# Allegro board RZ01-HMIB-V1.2-0609.brd
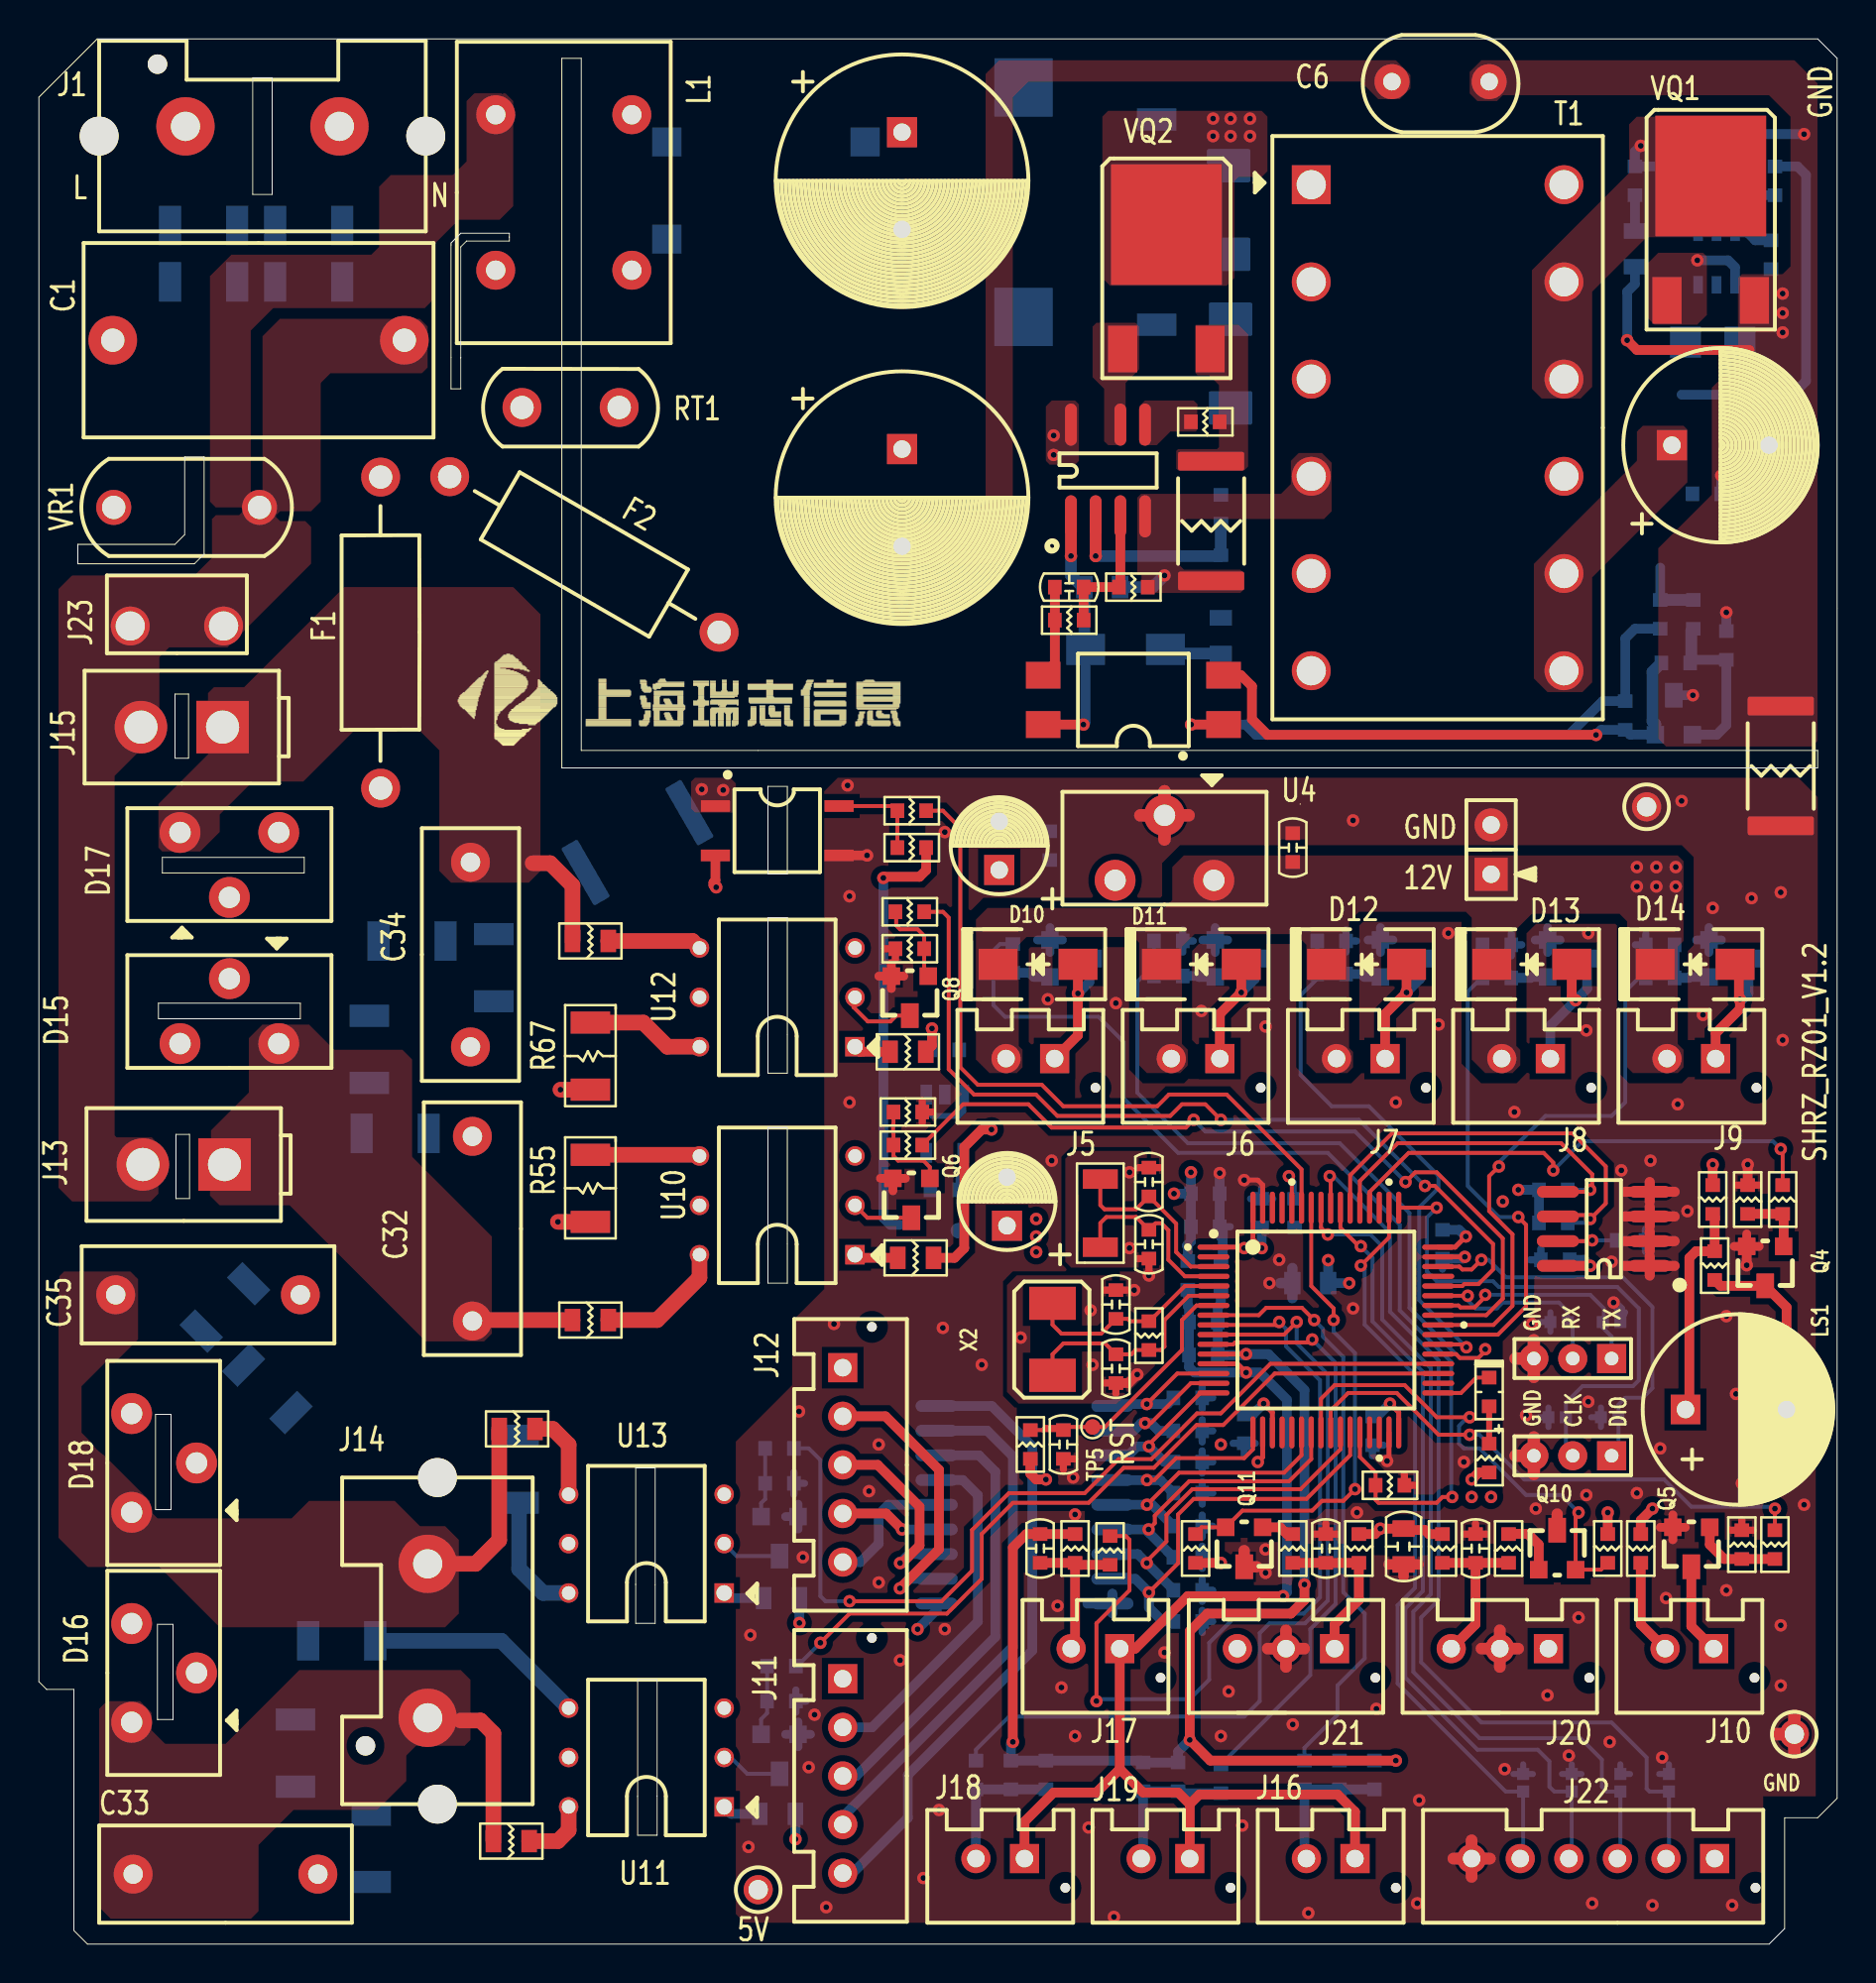
[diagram p0: board, top side]
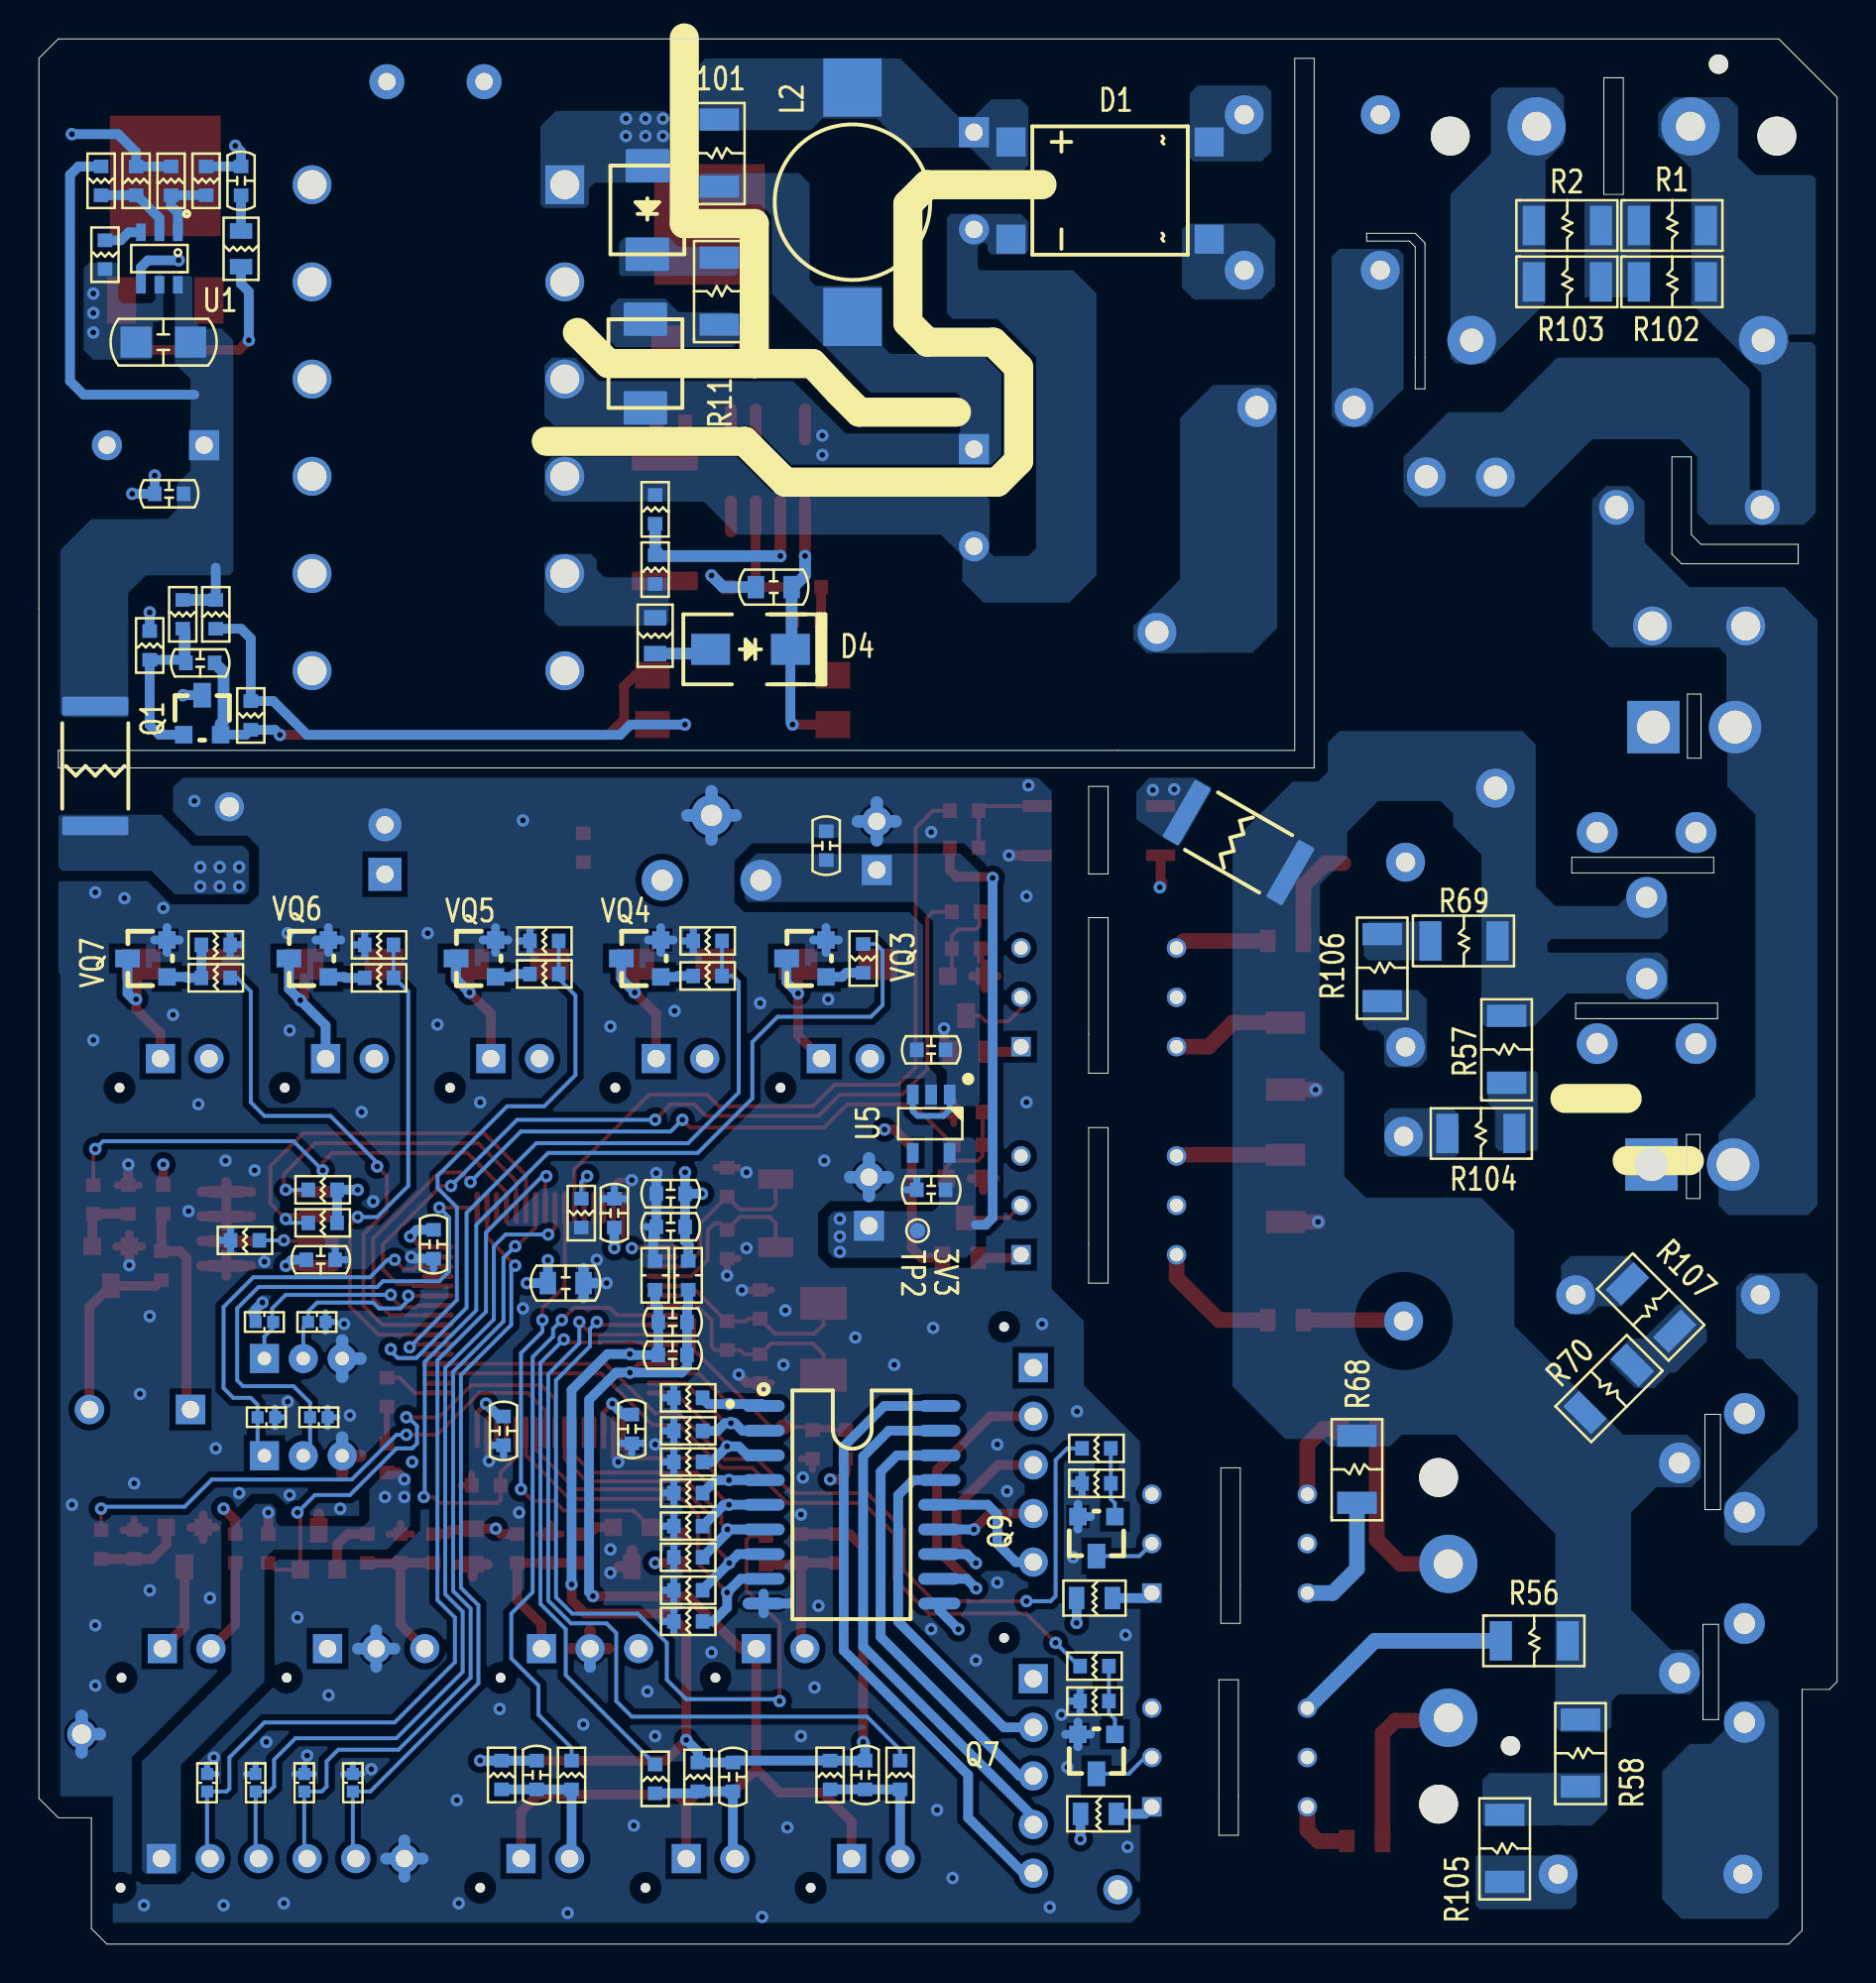
[diagram p1: board, bottom side, seen from below]

Outline 92.5 x 98 mm; copper layers: TOP, GND, PWR, BOTTOM. Coordinates in mm from the lower left corner of the outline.
Outline path: 0,95 0,13.5 0.4,13.1 1.8,13.1 1.8,0.7 2.5,0 89,0 89.8,0.8 89.8,6.5 91.5,6.5 92.5,7.5 92.5,97 91.5,98 3,98 0,95 ; 2,72 7,72 7.5,72.5 7.5,76.5 8.5,76.5 8.5,71.5 8,71 2,71 2,72 ; 6,27.25 6,22.35 6.8,22.35 6.8,27.25 6,27.25 ; 6.1,16.45 6.1,11.55 6.9,11.55 6.9,16.45 6.1,16.45 ; 6.15,48.4 6.15,47.6 13.45,47.6 13.45,48.4 6.15,48.4 ; 6.35,55.9 6.35,55.1 13.65,55.1 13.65,55.9 6.35,55.9 ; 7,64.3 7,61 7.7,61 7.7,64.3 7,64.3 ; 7.05,41.65 7.05,38.35 7.75,38.35 7.75,41.65 7.05,41.65 ; 11,96 11,90 12,90 12,96 11,96 ; 21.2,87.5 21.7,88 24.2,88 24.2,87.6 22,87.6 21.7,87.3 21.7,80 21.2,80 21.2,87.5 ; 26.9,97 26.9,60.5 91.5,60.5 91.5,61.4 27.9,61.4 27.9,97 26.9,97 ; 30.7,24.5 30.7,16.5 31.7,16.5 31.7,24.5 30.7,24.5 ; 30.8,13.6 30.8,5.6 31.8,5.6 31.8,13.6 30.8,13.6 ; 37.5,59.55 37.5,55.05 38.5,55.05 38.5,59.55 37.5,59.55 ; 37.5,52.8 37.5,44.8 38.5,44.8 38.5,52.8 37.5,52.8 ; 37.5,42 37.5,34 38.5,34 38.5,42 37.5,42

## Design rules (mm)
net group POW: nets N16936948 N16936962 N16936988 N16937095 N16937097 N16937111 N16937117 N16937127 N16937157 N16937225 N16937517 N16937797
net group PWR: nets GNDA GNDAC VCCA_3V3 VIN

## Placement (name value [footprint] x y rotation side)
C1  X2/1uF/275V  [X2-1770X960]  11.3 82.5 0 top
C2  RNU1C471MDN1PH/470uF/25V  [CAPPR500-1000X1250]  86.5 77.1 0 top
C3  22uF/400V/13*20  [CAPPR500-1300X2000]  44.4 90.7 270 top
C4  22uF/400V/13*20  [CAPPR500-1300X2000]  44.4 74.4 270 top
C5  1uF/100V/1206  [C1206]  86.1 82.4 0 bottom
C6  DE2E3KY222MA2BM01/2200pF/250V  [DIP-500P-800X500]  72.1 95.8 0 top
C7  0.1uF/50V/6  [C0603]  53 69.8 180 top
C8  1nF/50V/6  [C0603]  84.2 65.9 0 bottom
C9  4.7uF/35V/8  [C0805]  54.7 69.8 0 bottom
C10  1uF/25V/6  [C0603]  64.5 56.4 90 top
C11  0.1uF/50V/6  [C0603]  52 56.5 270 bottom
C12  100uF/25V/5*12  [CAPPR250-500X1200]  49.4 56.5 90 top
C13  1uF/25V/6  [C0603]  46.6 46 0 bottom
C14  0.1uF/50V/6  [C0603]  46.6 38.8 180 bottom
C15  100uF/25V/5*12  [CAPPR250-500X1200]  49.8 38.2 90 top
C16  10pF/50V/6  [C0603]  57.1 39.2 270 top
C17  10pF/50V/6  [C0603]  57.1 36 90 top
C18  10uF/16V/8  [C0805]  65.4 34 0 bottom
C19  0.1uF/50V/6  [C0603]  60 36.9 180 bottom
C20  0.1uF/50V/6  [C0603]  72.2 36 90 bottom
C21  0.1uF/50V/6  [C0603]  68.6 26.4 90 bottom
C22  0.1uF/50V/6  [C0603]  62 26.5 90 bottom
C23  0.1uF/50V/6  [C0603]  62.9 37.6 270 bottom
C24  20pF/50V/6  [C0603]  55.4 32.9 270 top
C25  20pF/50V/6  [C0603]  55.4 29.6 90 top
C26  1uF/25V/6  [C0603]  59.9 32 0 bottom
C27  0.1uF/50V/6  [C0603]  59.9 30.3 180 bottom
C29  1uF/25V/6  [C0603]  52.7 25.7 270 top
C30  0.1uF/50V/6  [C0603]  78 35.2 0 bottom
C32  X2/0.01uF/275V  [X2-1300X600]  22.3 36.8 270 top
C33  X2/0.01uF/275V  [X2-1300X600]  9.6 3.6 180 top
C34  X2/0.01uF/275V  [X2-1300X600]  22.2 50.9 90 top
C35  X2/0.01uF/275V  [X2-1300X600]  8.7 33.4 180 top
C36  0.01uF/50V/6  [C0603]  66.9 8.7 90 bottom
C37  0.01uF/50V/6  [C0603]  51.5 20.35 90 top
C38  0.01uF/50V/6  [C0603]  50 8.7 90 bottom
C39  0.01uF/50V/6  [C0603]  56.8 8.6 90 bottom
C40  0.01uF/50V/6  [C0603]  73.9 20.35 90 top
C41  1nF/50V/6  [C0603]  66.2 20.35 90 top
C42  10uF/16V/8  [C0805]  70.2 20.45 90 top
C43  0.1uF/50V/6  [C0603]  60 38.6 180 bottom
C44  1nF/100V/6  [C0603]  82.1 90.7 90 bottom
C45  0.1uF/50V/6  [C0603]  85.8 74.6 180 bottom
D1  -  [DF06S]  37.4 90.2 90 bottom
D2  SMBJ170A-13-F  [SMB]  61.3 81.3 270 bottom
D3  MURS360S  [SMB]  61.2 89.2 90 bottom
D4  US1K-E3/61T  [SMA]  57.75 66.6 180 bottom
D5  RLED  [LED0603]  74.6 28.4 90 top
D10  SS14  [SMA]  53.25 50.4 180 top
D11  SS14  [SMA]  61.65 50.4 180 top
D12  SS14  [SMA]  70.15 50.4 180 top
D13  SS14  [SMA]  78.65 50.4 180 top
D14  SS14  [SMA]  87.05 50.4 180 top
D15  TMG8C80F  [TO-220]  9.8 47.82 180 top
D16  TMG8C80F  [TO-220]  6.27 13.95 90 top
D17  TMG8C80F  [TO-220]  9.8 55.68 0 top
D18  TMG8C80F  [TO-220]  6.27 24.75 90 top
ED1  ESD9B5V  [D0402]  80.7 27.1 180 bottom
ED2  ESD9B5V  [D0402]  78 27.1 180 bottom
ED3  ESD9B5V  [D0402]  81 32 0 bottom
ED4  ESD9B5V  [D0402]  78.1 32 180 bottom
ED5  ESD9B5V  [D0402]  76.35 8.4 90 bottom
ED6  ESD9B5V  [D0402]  78.85 8.4 90 bottom
ED7  ESD9B5V  [D0402]  81.35 8.4 90 bottom
ED8  ESD9B5V  [D0402]  83.85 8.4 90 bottom
F1  250AC/10A/3.6*10  [DIP-F360X1000]  17.58 67.46 270 top
F2  250AC/2A/3.6*10  [DIP-F360X1000]  28.06 71.48 330 top
J1  CON2  [DIP780-1580X850-2N]  11.5 93.5 180 top
J2  CON2  [DIP254P-1X2]  74.7 55.03 90 top
J3  CON3  [DIP200P-1X3]  80.9 25.12 180 top
J4  CON3  [DIP200P-1X3]  80.9 30.12 180 top
J5  CON2  [XH2-54-1X2]  51 45.55 180 top
J6  CON2  [XH2-54-1X2]  59.5 45.55 180 top
J7  CON2  [XH2-54-1X2]  68 45.55 180 top
J8  CON2  [XH2-54-1X2]  76.5 45.55 180 top
J9  CON2  [XH2-54-1X2]  85 45.55 180 top
J10  CON2  [XH2-54-1X2]  84.9 15.2 180 top
J11  CON5  [XH2-54-1X5]  41.35 8.65 270 top
J12  CON5  [XH2-54-1X5]  41.35 24.65 270 top
J13  CON2  [5569-420-2N]  7.45 40.1 180 top
J14  CON2  [DIP780-1580X850-2N]  20 15.6 270 top
J15  CON2  [5569-420-2N]  7.35 62.6 180 top
J16  CON2  [XH2-54-1X2]  66.45 4.4 180 top
J17  CON2  [XH2-54-1X2]  54.35 15.2 180 top
J18  CON2  [XH2-54-1X2]  49.45 4.4 180 top
J19  CON2  [XH2-54-1X2]  57.95 4.4 180 top
J20  CON3  [XH2-54-1X3]  75.15 15.2 180 top
J21  CON3  [XH2-54-1X3]  64.15 15.2 180 top
J22  CON6  [XH2-54-1X6]  81.2 4.4 180 top
J23  CON2  [DIP480P-2N]  7.1 67.8 180 top
L1  5mH/1.5A/7*8  [L_7X8-4]  27 90.1 90 top
L2  NPI31W471MTRF/470uH/0.5A  [NPI31W471MTRF]  50.65 89.6 270 bottom
LFB1  CBW160808U601T/1A/6  [L0603]  59.1 34.4 270 bottom
LFB2  CBW160808U601T/1A/6  [L0603]  60.8 34.4 270 bottom
LS1  SPEAKER  [B9055]  87.2 27.5 0 top
Q1  TL432IDBZ  [SOT23]  84.1 63.2 180 bottom
Q4  MMBT3904LT1G  [SOT23]  88.8 34.9 180 top
Q5  MMBT3904LT1G  [SOT23]  85 20.45 180 top
Q6  MMBT3904LT1G  [SOT23]  44.88 38.4 180 top
Q7  MMBT3904LT1G  [SOT23]  38.1 9.8 0 bottom
Q8  MMBT3904LT1G  [SOT23]  44.8 48.8 180 top
Q9  MMBT3904LT1G  [SOT23]  38.1 21 0 bottom
Q10  MMBT3906LT1G  [SOT23]  78.1 20.25 0 top
Q11  MMBT3906LT1G  [SOT23]  62 20.45 180 top
R1  1M/1206  [R1206]  10.2 88.4 180 bottom
R2  1M/1206  [R1206]  15.6 88.4 180 bottom
R3  R005/2512  [R2512]  89.6 60.6 90 bottom
R4  365K/6  [R0603]  83.9 90.7 90 bottom
R5  10R/8  [R0805]  82.1 87.2 90 bottom
R6  301K/1%6  [R0603]  89.3 90.7 90 bottom
R7  10K/6  [R0603]  85.7 90.7 270 bottom
R8  71.5K/1%/6  [R0603]  60.8 70.7 270 bottom
R9  22R/8  [R0805]  60.8 67.3 90 bottom
R10  19.1K/1%/6  [R0603]  89.1 86.9 90 bottom
R11  44.2K/1%/6  [R0603]  87.5 90.7 270 bottom
R12  7.32K/1%/6  [R0603]  83.4 68.4 270 bottom
R13  1.24K/1%/6  [R0603]  60 78.3 0 top
R14  1K/6  [R0603]  81.6 63.2 90 bottom
R15  38.3K/1%/6  [R0603]  85.1 68.4 90 bottom
R16  205K/1%/6  [R0603]  53 68.1 0 top
R17  R500/2512  [R2512]  60.3 73.2 90 top
R18  18.7K/1%/6  [R0603]  56.3 69.8 180 top
R19  19.6K/1%/6  [R0603]  60.8 73.8 270 bottom
R20  10K/1%/6  [R0603]  86.8 66.8 270 bottom
R21  1M/6/NC  [R0603]  57.1 31.3 90 top
R24  10K/6  [R0603]  64.6 37.6 90 bottom
R25  10K/6  [R0603]  69.5 23.6 180 top
R26  10K/6  [R0603]  51 25.7 270 top
R27  1K/6  [R0603]  74.6 25 270 top
R30  4.7K/6  [R0603]  77.9 37.1 180 bottom
R31  4.7K/6  [R0603]  77.9 38.8 180 bottom
R32  1K/6  [R0603]  81.9 36.2 180 bottom
R33  1K/6  [R0603]  50.1 50.7 90 bottom
R34  1K/6  [R0603]  58.1 49.8 180 bottom
R35  100K/6  [R0603]  58.1 51.6 180 bottom
R36  100R/6  [R0603]  86.1 38.3 90 top
R38  1K/6  [R0603]  66.5 49.9 180 bottom
R39  1K/6  [R0603]  75 49.7 180 bottom
R41  100K/6  [R0603]  66.5 51.6 180 bottom
R42  100K/6  [R0603]  75 51.4 180 bottom
R44  1K/6  [R0603]  86.2 34.9 90 top
R46  1K/6  [R0603]  89.7 38.3 270 top
R47  220R/6  [R0603]  82.4 20.35 90 top
R48  100K/6  [R0603]  87.9 38.3 270 top
R49  1K/6  [R0603]  89.3 20.55 90 top
R50  1K/6  [R0603]  83.4 49.7 180 bottom
R51  100K/6  [R0603]  83.4 51.4 0 bottom
R52  100K/6  [R0603]  87.6 20.55 270 top
R53  200R/8  [R0805]  45.1 35.3 180 top
R54  200R/8  [R0805]  38 6.7 180 bottom
R55  510R/1206  [R1206]  28.37 40.6 270 top
R56  510R/1206  [R1206]  17.3 15.6 180 bottom
R57  100R/1206  [R1206]  17 44.3 90 bottom
R58  100R/1206  [R1206]  13.2 8.1 90 bottom
R59  10K/6  [R0603]  44.7 41.1 180 top
R60  10K/6  [R0603]  38.2 14.3 180 bottom
R61  200R/8  [R0805]  28.37 32.1 180 top
R62  100K/6  [R0603]  44.7 42.8 180 top
R63  100K/6  [R0603]  38.2 12.5 180 bottom
R64  200R/8  [R0805]  24.3 5.3 180 top
R65  200R/8  [R0805]  44.7 45.9 180 top
R66  200R/8  [R0805]  38.2 17.8 180 bottom
R67  510R/1206  [R1206]  28.37 47.4 270 top
R68  510R/1206  [R1206]  24.7 22.7 90 bottom
R69  100R/1206  [R1206]  20.92 51.6 180 bottom
R70  100R/1206  [R1206#2]  10.53 29.78 315 bottom
R71  10K/6  [R0603]  44.8 53.1 180 top
R72  10K/6  [R0603]  38.1 25.5 180 bottom
R73  100K/6  [R0603]  44.8 51.2 0 top
R74  200R/8  [R0805]  28.37 51.6 180 top
R75  100K/6  [R0603]  38.1 23.7 180 bottom
R76  200R/8  [R0805]  24.6 26.5 180 top
R77  43K/2512  [R2512]  30.79 56.66 210 bottom
R78  4.7K/6  [R0603]  44.9 56.4 180 top
R79  1K/6  [R0603]  44.9 58.3 180 top
R80  1K/6  [R0603]  65.1 8.7 270 bottom
R81  1K/6  [R0603]  55.1 20.25 270 top
R82  6.8K/1%/6  [R0603]  68.7 8.7 270 bottom
R83  51K/1%/6  [R0603]  53.3 20.35 270 top
R84  1K/6  [R0603]  48.2 8.7 270 bottom
R85  1K/6  [R0603]  60.8 8.5 270 bottom
R86  51K/1%/6  [R0603]  51.8 8.7 270 bottom
R87  6.8K/1%/6  [R0603]  58.6 8.6 270 bottom
R88  10K/6  [R0603]  80.7 20.35 90 top
R89  10K/6  [R0603]  59.5 20.35 270 top
R90  10K/6  [R0603]  72.2 20.35 90 top
R91  10K/6  [R0603]  67.9 20.35 90 top
R92  1K/6  [R0603]  75.6 20.35 270 top
R93  1K/6  [R0603]  64.5 20.35 270 top
R101  0R/1206/NC  [R1206]  57.5 90.4 90 bottom
R102  1M/1206  [R1206]  10.2 85.5 180 bottom
R103  1M/1206  [R1206]  15.6 85.5 180 bottom
R104  100R/1206  [R1206]  16.6 41.7 0 bottom
R105  100R/1206  [R1206]  17.1 3.2 90 bottom
R106  100R/1206  [R1206]  23.4 48.5 90 bottom
R107  100R/1206  [R1206#2]  10.79 33.97 225 bottom
R108  10K/6  [R0603]  59.1 28.1 180 bottom
R109  10K/6  [R0603]  59.1 26.4 180 bottom
R110  10K/6  [R0603]  59.1 24.8 180 bottom
R111  10K/6  [R0603]  59.1 23.2 180 bottom
R112  10K/6  [R0603]  59.1 21.5 180 bottom
R113  10K/6  [R0603]  59.1 19.9 180 bottom
R114  10K/6  [R0603]  59.1 18.2 180 bottom
R115  10K/6  [R0603]  59.1 16.6 180 bottom
R116  49.9R/1206  [R1206]  57.5 83.3 90 bottom
R117  R005/2512  [R2512]  89.6 60.6 90 top
RT1  -  [NTC10D-9]  27.35 79.04 0 top
T1  TRAN_ISDN_10  [T_30X17-12]  71.95 78 0 top
TP1  VCC_5V0  [TP150D100]  37 2.8 0 top
TP2  VCC_3V3  [TP_PAD]  47.3 36.7 270 bottom
TP3  GND  [TP150D100]  82.7 58.5 0 top
TP4  GND  [TP150D100]  90.3 10.8 0 top
TP5  RST#  [TP_PAD]  54.2 26.6 0 top
U1  UCC24636DBV  [SOT23_6]  86.3 86.7 0 bottom
U2  UCC28740D  [SOIC127P600X175-7]  55 75.8 0 top
U3  EL817S1B  [SOIC254P760X460-4]  56.3 64 90 top
U4  L7805CV-DG/NCV7805BTG  [TO-220]  57.9 56.22 180 top
U5  LP3987H-33B5F/RT9013-33GB  [SOT23-5]  46.6 42.2 90 bottom
U6  STM32F103R8T6  [TSQFP50P1200X1200X145-64]  66.2 32.1 0 top
U8  AT24C64D-SSHM/CAT24C64WI-GT  [SOIC127P600X175-8]  80.5 36.8 90 top
U9  ULN2803A  [SOIC127P1032X265-18]  50.7 22.6 270 bottom
U10  MOC3063  [DIP254-760X660-6]  37.98 38 180 top
U11  MOC3063  [DIP254-760X660-6]  31.25 9.6 180 top
U12  MOC3063  [DIP254-760X660-6]  37.98 48.7 180 top
U13  MOC3063  [DIP254-760X660-6]  31.25 20.6 180 top
U14  EL354N  [SOIC254P440X410-4]  37.98 57.27 270 top
VQ1  SiHD6N65E/STD12N65M2  [TO-252]  86 90.95 0 top
VQ2  SiHD6N65E/STD12N65M2  [TO-252]  58 88.45 0 top
VQ3  AO3404A  [SOT23]  53 50.7 90 bottom
VQ4  AO3404A  [SOT23]  61.5 50.7 90 bottom
VQ5  AO3404A  [SOT23]  70 50.7 90 bottom
VQ6  AO3404A  [SOT23]  78.6 50.7 90 bottom
VQ7  AO3404A  [SOT23]  86.9 50.7 90 bottom
VR1  -  [MYG3-10D431K]  7.6 73.9 180 top
X1  32.768KHz/CL=7pF  [SMD3215]  54.6 35.85 90 top
X2  8MHz/CL=20pF  [CRYTAL_17X24]  52.14 29.26 90 top

## Library data of the parts
C1 C5 C6 C32-C35 = C_0
C2 = CAPACITOR: Tolerance: RichardLC; User Part Number: pn
C3 C4 C12 C15 = CAPACITOR: User Part Number: pn; Tolerance: RichardLC
C7-C10 C13 C16 C17 C24-C26 C29 C36-C41 = C_0: User Part Number: pn; Tolerance: RichardLC
C11 C14 C18-C23 C27 C30 C42-C45 = CAP NP: User Part Number: pn; Tolerance: RichardLC
D1 = GBPC608_1
D2 = DIODE ZENER: User Part Number: pn; Tolerance: RichardLC
D3 = DIODE SCHOTTKY_0: User Part Number: pn; Tolerance: RichardLC
D4 = DIODE SCHOTTKY_0
D5 = LED: User Part Number: pn; Tolerance: RichardLC
D10-D14 = DIODE SCHOTTKY
D15-D18 = GTO A1A2G_0
ED1-ED8 = TVS: Tolerance: RichardLC; User Part Number: pn
F1 F2 = FUSE: Tolerance: RichardLC
J1 J5-J10 J13-J19 J23 = CON2
J2 = CON2: User Part Number: pn; Tolerance: RichardLC
J3 J4 = CON3: User Part Number: pn; Tolerance: RichardLC
J11 J12 = CON5
J20 J21 = CON3
J22 = CON6
L1 = R-PACK4_0: Tolerance: RichardLC
L2 = INDUCTOR
LFB1 LFB2 = EMIFIL: User Part Number: 04201000008830; Tolerance: RichardLC
LS1 = SPEAKER_0
Q1 = TL431IDBZ_0
Q4-Q9 = NPN_1
Q10 Q11 = PNP
R1 R2 R55-R58 R67-R70 R101-R107 R116 RT1 = R
R3 R4 R6-R8 R10-R21 R24 R25 R27 R33-R35 R38 R39 R41 R42 R44 R46-R52 R59 R60 R62 R63 R71-R73 R75 R77-R93 R108-R115 R117 = R: User Part Number: pn; Tolerance: RichardLC
R5 R9 R53 R54 R61 R64-R66 R74 R76 = R: Tolerance: RichardLC; User Part Number: pn
R26 R36 = RESISTOR: User Part Number: pn; Tolerance: RichardLC
R30-R32 = Res1_0: User Part Number: pn; Tolerance: RichardLC
T1 = TRAN_ISDN_9: Tolerance: RichardLC
TP1 TP3 TP4 = TEST POINT: User Part Number: pn; Tolerance: RichardLC
TP2 TP5 = T_POINT_R
U1 = UCC24636DBV
U2 = UCC28740D: User Part Number: pn; Tolerance: RichardLC
U3 = TLP181_1: User Part Number: pn; Tolerance: RichardLC
U4 = LM7805MP_2
U5 = RT9050
U6 = STM32F103R8T6: Tolerance: RichardLC; User Part Number: pn
U8 = 24C64_0: User Part Number: pn; Tolerance: RichardLC
U9 = ULN2803A: Tolerance: RichardLC; User Part Number: pn
U10 U11 = MOC3063_1
U12 U13 = MOC3063_2
U14 = AC-Optocoupler: User Part Number: pn; Tolerance: RichardLC
VQ1 VQ2 = NMOS_0
VQ3-VQ7 = IRF_N_G1S2D3
VR1 = RESISTOR VAR 2
X1 X2 = CRYSTAL_0

## Footprints (pads in the part's own frame, mm; a bottom-side part is the same pattern mirrored in y, then rotated)
5569-420-2N
  rect 2.7x2.7 hole 1.7: 1(-2.1,0)
  round 2.7 hole 1.7: 2(2.1,0)
B9055
  rect 1.52x1.52 hole 0.9: 1(-2.5,0)
  round 1.52 hole 0.9: 2(2.7,0)
C0603
  rect 0.7x0.75 smd: 1(-0.74,0) 2(0.74,0)
C0805
  rect 0.85x1.15 smd: 1(-0.92,0) 2(0.92,0)
C1206
  rect 1.6x1.6 smd: 1(-1.4,0) 2(1.4,0)
CAPPR250-500X1200
  rect 1.55x1.55 hole 0.9: 1(-1.25,0)
  round 1.55 hole 0.9: 2(1.25,0)
CAPPR500-1000X1250
  rect 1.55x1.55 hole 0.9: 1(-2.5,0)
  round 1.55 hole 0.9: 2(2.5,0)
CAPPR500-1300X2000
  rect 1.55x1.55 hole 0.9: 1(-2.5,0)
  round 1.55 hole 0.9: 2(2.5,0)
CRYTAL_17X24
  rect 1.7x2.4 smd: 1(0,0) 2(3.7,0)
D0402
  rect 0.62x0.62 smd: 1(-0.55,0) 2(0.35,0)
DF06S
  rect 1.5x1.5 smd: 1(2.5,5.1) 2(-2.5,5.1) 3(2.5,-5.1) 4(-2.5,-5.1)
DIP200P-1X3
  rect 1.5x1.5 hole 0.7: 1(0,0)
  round 1.5 hole 0.7: 2(2,0) 3(4,0)
DIP254-760X660-6
  rect 1x1 hole 0.8: 1(-4,2.54)
  round 1 hole 0.7: 2(-4,0) 3(-4,-2.54) 4(4,-2.54) 5(4,0) 6(4,2.54)
DIP254P-1X2
  rect 1.7x1.7 hole 0.9: 1(0,0)
  round 1.7 hole 0.9: 2(2.54,0)
DIP480P-2N
  round 2 hole 1.5: 1(-2.4,0) 2(2.4,0)
DIP780-1580X850-2N
  round 2 hole 3 unplated: (-8.4,0.5) (8.4,0.5)
  round 1 hole 1.5 unplated: (5.4,-3.2)
  round 3 hole 1.5: 1(3.96,0) 2(-3.96,0)
DIP-500P-800X500
  round 1.8 hole 0.9: 1(-2.5,0) 2(2.5,0)
DIP-F360X1000
  round 2 hole 1.2: 1(-8,0) 2(8,0)
L0603
  rect 0.7x0.75 smd: 1(-0.74,0) 2(0.74,0)
L_7X8-4
  round 2 hole 1: 1(-4,3.5) 2(-4,-3.5) 3(4,3.5) 4(4,-3.5)
LED0603
  rect 0.7x0.75 smd: 1(0.74,0) 2(-0.74,0)
MYG3-10D431K
  round 1.8 hole 1.2: 1(-3.75,0) 2(3.75,0)
NPI31W471MTRF
  rect 3x3 smd: 1(-5.9,0) 2(5.9,0)
NTC10D-9
  round 2 hole 1.2: 1(-2.5,0) 2(2.5,0)
R0603
  rect 0.7x0.75 smd: 1(-0.74,0) 2(0.74,0)
R0805
  rect 0.8x1.15 smd: 1(-0.92,0) 2(0.92,0)
R1206
  rect 1.14x2.03 smd: 1(0,0) 2(3.45,0)
R1206#2
  rect 1.14x2.03 smd: 1(0,0) 2(3.45,0)
R2512
  custom 0.96x3.4 smd: 1(-3.08,0) 2(3.08,0)
SMA
  rect 2x1.6 smd: 1(-0.2,0) 2(3.91,0)
SMB
  custom 1.72x2.24 smd: 1(2.28,0) 2(-2.28,0)
SMD3215
  rect 1x1.8 smd: 1(0,0) 2(3.5,0)
SOIC127P600X175-7
  oval 0.61x2.17 smd: 1(-1.91,-2.36) 2(-0.64,-2.36) 3(0.63,-2.36) 4(1.9,-2.36) 5(1.9,2.36) 6(0.63,2.36) 8(-1.91,2.36)
SOIC127P600X175-8
  oval 0.61x2.17 smd: 1(-1.91,-2.36) 2(-0.64,-2.36) 3(0.63,-2.36) 4(1.9,-2.36) 5(1.9,2.36) 6(0.63,2.36) 7(-0.64,2.36) 8(-1.91,2.36)
SOIC127P1032X265-18
  oval 0.61x2.17 smd: 1(-5.08,-4.52) 2(-3.81,-4.52) 3(-2.54,-4.52) 4(-1.27,-4.52) 5(0,-4.52) 6(1.27,-4.52) 7(2.54,-4.52) 8(3.81,-4.52) 9(5.08,-4.52) 10(5.08,4.52) 11(3.81,4.52) 12(2.54,4.52) 13(1.27,4.52) 14(0,4.52) 15(-1.27,4.52) 16(-2.54,4.52) 17(-3.81,4.52) 18(-5.08,4.52)
SOIC254P440X410-4
  rect 0.6x1.5 smd: 1(-1.27,-3.18) 2(1.27,-3.18) 3(1.27,3.18) 4(-1.27,3.18)
SOIC254P760X460-4
  rect 1.38x1.78 smd: 1(-1.27,-4.64) 2(1.27,-4.64) 3(1.27,4.64) 4(-1.27,4.64)
SOT23
  rect 0.9x0.9 smd: 1(-0.95,-0.99) 2(0.95,-0.99)
  rect 0.91x1.27 smd: 3(0,1.04)
SOT23-5
  rect 1.02x0.6 smd: 1(1.5,-0.95) 2(1.5,0) 3(1.5,0.95) 4(-1.5,0.95) 5(-1.5,-0.95)
SOT23_6
  rect 0.5x0.9 smd: 1(-0.95,-1.35) 2(0,-1.35) 3(0.95,-1.35) 4(0.95,1.35) 5(0,1.35) 6(-0.95,1.35)
T_30X17-12
  rect 2x2 hole 1.5: 1(-6.5,12.5)
  round 2 hole 1.5: 2(-6.5,7.5) 3(-6.5,2.5) 4(-6.5,-2.5) 5(-6.5,-7.5) 6(-6.5,-12.5) 7(6.5,-12.5) 8(6.5,-7.5) 9(6.5,-2.5) 10(6.5,2.5) 11(6.5,7.5) 12(6.5,12.5)
TO-220
  round 2.1 hole 1.1: 1(-2.54,1.5) 2(0,-1.84) 3(2.54,1.5)
TO-252
  rect 1.5x2.4 smd: 1(-2.25,-6.4) 3(2.25,-6.4)
  rect 5.7x6.2 smd: 2(0,0)
TP150D100
  round 1.5 hole 1: 1(0,0)
TP_PAD
  round 0.8 smd: 1(0,0)
TSQFP50P1200X1200X145-64
  oval 1.65x0.27 smd: 1(-5.78,3.75) 2(-5.78,3.25) 3(-5.78,2.75) 4(-5.78,2.25) 5(-5.78,1.75) 6(-5.78,1.25) 7(-5.78,0.75) 8(-5.78,0.25) 9(-5.78,-0.25) 10(-5.78,-0.75) 11(-5.78,-1.25) 12(-5.78,-1.75) 13(-5.78,-2.25) 14(-5.78,-2.75) 15(-5.78,-3.25) 16(-5.78,-3.75) 33(5.78,-3.75) 34(5.78,-3.25) 35(5.78,-2.75) 36(5.78,-2.25) 37(5.78,-1.75) 38(5.78,-1.25) 39(5.78,-0.75) 40(5.78,-0.25) 41(5.78,0.25) 42(5.78,0.75) 43(5.78,1.25) 44(5.78,1.75) 45(5.78,2.25) 46(5.78,2.75) 47(5.78,3.25) 48(5.78,3.75)
  oval 0.27x1.65 smd: 17(-3.75,-5.78) 18(-3.25,-5.78) 19(-2.75,-5.78) 20(-2.25,-5.78) 21(-1.75,-5.78) 22(-1.25,-5.78) 23(-0.75,-5.78) 24(-0.25,-5.78) 25(0.25,-5.78) 26(0.75,-5.78) 27(1.25,-5.78) 28(1.75,-5.78) 29(2.25,-5.78) 30(2.75,-5.78) 31(3.25,-5.78) 32(3.75,-5.78) 49(3.75,5.78) 50(3.25,5.78) 51(2.75,5.78) 52(2.25,5.78) 53(1.75,5.78) 54(1.25,5.78) 55(0.75,5.78) 56(0.25,5.78) 57(-0.25,5.78) 58(-0.75,5.78) 59(-1.25,5.78) 60(-1.75,5.78) 61(-2.25,5.78) 62(-2.75,5.78) 63(-3.25,5.78) 64(-3.75,5.78)
X2-1300X600
  round 2 hole 1: 1(-4.75,0) 2(4.75,0)
X2-1770X960
  round 2.5 hole 1.2: 1(-7.5,0) 2(7.5,0)
XH2-54-1X2
  round 0.5 hole 1.2 unplated: (-3.35,1.5)
  rect 1.5x1.5 hole 0.9: 1(-1.25,0)
  round 1.5 hole 0.9: 2(1.25,0)
XH2-54-1X3
  round 0.5 hole 1.2 unplated: (-4.6,1.5)
  rect 1.5x1.5 hole 0.9: 1(-2.5,0)
  round 1.5 hole 0.9: 2(0,0) 3(2.5,0)
XH2-54-1X5
  round 0.5 hole 1.2 unplated: (-7.1,1.5)
  rect 1.5x1.5 hole 0.9: 1(-5,0)
  round 1.5 hole 0.9: 2(-2.5,0) 3(0,0) 4(2.5,0) 5(5,0)
XH2-54-1X6
  round 0.5 hole 1.2 unplated: (-7.1,1.5)
  rect 1.5x1.5 hole 0.9: 1(-5,0)
  round 1.5 hole 0.9: 2(-2.5,0) 3(0,0) 4(2.5,0) 5(5,0) 6(7.5,0)

## Nets
12V0: C2.1 C5.1 C45.2 R3.2 R6.2 R12.1 R15.2 T1.7 T1.8 U1.6(VDD)
GND: C10.2 C11.1 C12.2 C13.2 C14.1 C15.2 C16.1 C17.1 C18.1 C19.1 C20.1 C21.1 C22.1 C23.1 C24.1 C25.1 C29.2 C30.1 C40.2 C41.2 C42.1 C43.1 ED1.2 ED2.2 ED3.2 ED4.2 ED5.2 ED6.2 ED7.2 ED8.2 J2.2 J3.3 J4.3 J20.2 J21.2 J22.6 LFB2.1 Q4.2(E) Q5.2(E) Q6.2(E) Q7.2(E) Q8.2(E) Q9.2(E) Q10.3(COLLECTOR) Q11.3(COLLECTOR) R24.1 R25.1 R32.1 R35.1 R41.1 R42.1 R48.1 R51.1 R52.1 R62.1 R63.1 R73.1 R75.1 R108.1 R109.1 R110.1 R111.1 R112.1 R113.1 R114.1 R115.1 R117.1 TP3.1 TP4.1 U4.2(GND) U5.2(GND) U6.18(VSS_4) U6.31(VSS_1) U6.47(VSS_2) U6.63(VSS_3) U8.1(A0/NC) U8.2(A1/NC) U8.3(A2) U8.4(GND) U9.9(GND) U14.3(EMITTER) VQ3.2(S) VQ4.2(S) VQ5.2(S) VQ6.2(S) VQ7.2(S)
GNDA: C26.2 C27.1 C36.2 C37.2 C38.2 C39.2 LFB2.2 R82.1 R83.1 R86.1 R87.1 U6.12(VSSA)
GNDAC: C3.2 C4.2 C6.1 C9.2 D1.2 R17.1 R18.1 R19.1 T1.4 U2.4(GND)
GNDS: C2.2 C5.2 C6.2 C45.1 Q1.3(ANODE) R5.1 R7.1 R10.1 R11.1 R20.1 R117.2 U1.5(GND) VQ1.3(S)
VCC_3V3: C14.2 C15.1 C18.2 C19.2 C20.2 C21.2 C22.2 C23.2 C30.2 C43.2 J22.1 LFB1.1 R26.2 R27.2 R30.2 R31.2 R78.1 R88.2 R89.2 TP2.1(TP) U5.5(VOUT) U6.1(VBAT) U6.19(VDD_4) U6.32(VDD_1) U6.48(VDD_2) U6.64(VDD_3) U8.8(VCC)
VCC_5V0: C11.2 C12.1 C13.1 C42.2 J20.1 J21.3 R36.2 R47.2 R53.1 R54.1 R65.1 R66.1 R90.2 R91.2 TP1.1 U4.3(OUTPUT) U5.1(VIN) U5.3(EN)
VCC_12V: C10.1 D10.2(CATHODE) D11.2(CATHODE) D12.2(CATHODE) D13.2(CATHODE) D14.2(CATHODE) J2.1 J5.2 J6.2 J7.2 J8.2 J9.2 J11.1 J12.1 R3.1 U4.1(INPUT) U9.10(COM)
VCCA_3V3: C26.1 C27.2 J16.1 J17.1 J18.1 J19.1 LFB1.2 U6.13(VDDA)
VIN: C3.1 D1.1 L2.1 R101.2
ADC12_IN10: R80.1 U6.8(PC0)
ADC12_IN11: R81.1 U6.9(PC1)
ADC12_IN12: R84.1 U6.10(PC2)
ADC12_IN13: R85.1 U6.11(PC3)
AIRFAN_CTR: R50.2 U6.40(PC9)
AIRPUMP_CTR: R34.2 R35.2 U6.37(PC6)
BEEP_CTR: R46.1 U6.52(PC11)
BOOT0: R24.2 U6.60(BOOT0)
DEO_CTR: R39.2 R42.2 U6.39(PC8)
DIS_A_CTR: R108.2 U6.14(PA0/WKUP) U9.1(1B)
DIS_B_CTR: R109.2 U6.15(PA1) U9.2(2B)
DIS_C_CTR: R110.2 U6.16(PA2/USART2_TX) U9.3(3B)
DIS_D_CTR: R111.2 U6.17(PA3/USART2_RX) U9.4(4B)
FLOW_DET: Q11.2(EMITTER) R89.1 U6.58(PB6)
I2C1_SCL: R30.1 U6.54(PD2) U8.6(SCL)
I2C1_SDA: R31.1 U6.53(PC12) U8.5(SDA)
KEY_INT: ED5.1 J22.5 U6.50(PA15/JTDI)
L: C1.1 F1.1 F2.1 J1.1 R1.2 R102.2 VR1.2
L1: L1.1(R1) RT1.1
L2: D15.2(T2) D16.2(T2) D17.2(T2) D18.2(T2) F1.2 R55.2 R56.2 R57.2 R58.2 R67.2 R68.2 R69.2 R70.2 R77.2
LED_CTR: R49.2 U6.25(PC5)
N: C1.2 J1.2 J13.2 J15.2 J23.1 J23.2 L1.3(R3) R2.1 R103.1 U14.2(CATHODE/ANODE) VR1.1
NOZ_A_CTR: R112.2 U6.22(PA6/SPI1_MISO) U9.5(5B)
NOZ_B_CTR: R113.2 U6.23(PA7/SPI1_MOSI) U9.6(6B)
NOZ_C_CTR: R114.2 U6.26(PB0) U9.7(7B)
NOZ_D_CTR: R115.2 U6.27(PB1) U9.8(8B)
OSC32_IN: C16.2 U6.3(PC14/OSC32_IN) X1.2
OSC32_OUT: C17.2 U6.4(PC15/OSC32_OUT) X1.1
OSC_IN: C24.2 R21.2 U6.5(PD0/OSC_IN) X2.2
OSC_OUT: C25.2 R21.1 U6.6(PD1/OSC_OUT) X2.1
PWM1_CTR: R59.1 U6.41(PA8)
PWM2_CTR: R71.1 U6.44(PA11/USBDM)
PWM3_CTR: R60.1 U6.35(PB14/SPI2_MISO)
PWM4_CTR: R72.1 U6.36(PB15/SPI2_MOSI)
SPI1_MISO: ED8.1 J22.2 U6.56(PB4/NJTRST)
SPI1_MOSI: ED7.1 J22.3 U6.57(PB5)
SPI1_SCK: ED6.1 J22.4 U6.55(PB3/JTDO)
STM32_ACT: D5.1(C) U6.33(PB12/SPI2_NSS)
STM32_RST#: C29.1 R26.1 TP5.1(TP) U6.7(N\R\S\T\)
SWCLK: ED2.1 J3.2 U6.49(PA14/JTCK/SWCLK)
SWDIO: ED1.1 J3.1 U6.46(PA13/JTMS/SWDIO)
TOUCH_DET: Q10.2(EMITTER) R88.1 U6.24(PC4)
USART1_RX: ED4.1 J4.2 U6.43(PA10/USART1_RX)
USART1_TX: ED3.1 J4.1 U6.42(PA9/USART1_TX)
UV_CTR: R25.2 R33.2 U6.28(PB2/BOOT1)
WATERSV_CTR: R38.2 R41.2 U6.38(PC7)
ZPD: R79.1 U6.59(PB7)
N16929349: C44.2 R4.2 T1.10 T1.11 VQ1.2(D)
N16929367: C4.1 D2.1(ANODE) L2.2 R101.1 T1.3 U2.8(HV)
N16929371: R1.1 R2.2 R102.1 R103.2
N16929415: D1.4 L1.2(R2)
N16929423: D1.3 L1.4(R4)
N16929439: C8.1 Q1.2(CATHODE) R14.1 U3.2(CATHODE)
N16929443: R12.2 R14.2 U3.1(ANODE)
N16929461: C8.2 Q1.1(REF) R15.1 R20.2
N16929475: C7.1 R16.2 R18.2 U2.3(FB)
N16929487: C7.2 R16.1 U3.3(EMITTER)
N16929499: R8.2 R9.2 T1.5
N16929503: D4.1(ANODE) R9.1
N16929505: C9.1 D4.2(CATHODE) U2.1(VDD) U3.4(COLLECTOR)
N16929519: R8.1 R19.2 U2.2(VS)
N16929525: R13.1 U2.5(CS)
N16929527: R13.2 R17.2 VQ2.3(S)
N16929535: U2.6(DRV) VQ2.1(G)
N16929541: D3.1(ANODE) T1.1 VQ2.2(D)
N16929605: F2.2 RT1.2
N16930021: U1.4(DRV) VQ1.1(G)
N16930023: R4.1 R7.2 U1.1(VPC)
N16930063: R10.2 U1.3(TBLK)
N16930103: R6.1 R11.2 U1.2(VSC)
N16932256: D5.2(A) R27.1
N16932453: R32.2 U8.7(WP)
N16934524: LS1.1 R36.1 R44.2
N16934528: LS1.2 Q4.3(C) R44.1
N16934693: D12.1(ANODE) J7.1 VQ5.3(D)
N16934756: D13.1(ANODE) J8.1 VQ6.3(D)
N16934805: D11.1(ANODE) J6.1 VQ4.3(D)
N16934865: D14.1(ANODE) J9.1 VQ7.3(D)
N16934913: R34.1 VQ4.1(G)
N16934946: R38.1 VQ5.1(G)
N16934979: R39.1 VQ6.1(G)
N16935020: R50.1 R51.2 VQ7.1(G)
N16935053: R33.1 VQ3.1(G)
N16935063: D10.1(ANODE) J5.1 VQ3.3(D)
N16935139: Q5.1(B) R49.1 R52.2
N16935141: J10.1 Q5.3(C)
N16935153: J10.2 R47.1
N16935178: Q4.1(B) R46.2 R48.2
N16935952: J11.5 U9.18(1C)
N16935958: J11.4 U9.17(2C)
N16935964: J11.3 U9.16(3C)
N16935970: J11.2 U9.15(4C)
N16935976: J12.5 U9.14(5C)
N16935982: J12.4 U9.13(6C)
N16935988: J12.3 U9.12(7C)
N16935994: J12.2 U9.11(8C)
N16936948: C32.2 D15.1(T1) J13.1 R61.2
N16936962: C34.2 D17.1(T1) J15.1 R74.2
N16936988: C35.2 D18.1(T1) J14.2 R76.2
N16936994: C33.2 D16.1(T1) J14.1 R64.2
N16937095: R57.1 R104.1
N16937097: C32.1 R104.2
N16937111: R58.1 R105.2
N16937117: C33.1 R105.1
N16937127: R69.1 R106.2
N16937157: R70.1 R107.2
N16937195: R78.2 R79.2 U14.4(COLLECTOR)
N16937225: R77.1 U14.1(ANODE/CATHODE)
N16937247: R53.2 U10.1(LED ANODE)
N16937249: Q6.3(C) U10.2(LED CATHODE)
N16937284: Q6.1(B) R59.2 R62.2
N16937315: D15.3(GATE) R61.1 U10.6(ANODE1)
N16937351: R55.1 U10.4(ANODE2)
N16937398: Q8.3(C) U12.2(LED CATHODE)
N16937400: R65.2 U12.1(LED ANODE)
N16937449: Q8.1(B) R71.2 R73.2
N16937461: D17.3(GATE) R74.1 U12.4(ANODE2)
N16937489: R67.1 U12.6(ANODE1)
N16937517: C34.1 R106.1
N16937538: Q7.3(C) U11.2(LED CATHODE)
N16937540: R54.2 U11.1(LED ANODE)
N16937587: Q7.1(B) R60.2 R63.2
N16937601: D16.3(GATE) R64.1 U11.6(ANODE1)
N16937629: R56.1 U11.4(ANODE2)
N16937692: Q9.3(C) U13.2(LED CATHODE)
N16937694: R66.2 U13.1(LED ANODE)
N16937733: Q9.1(B) R72.2 R75.2
N16937749: D18.3(GATE) R76.1 U13.4(ANODE2)
N16937785: R68.1 U13.6(ANODE1)
N16937797: C35.1 R107.1
N16938457: C40.1 J20.3 R90.1 R92.2
N16938475: Q10.1(BASE) R92.1
N16938527: C41.1 J21.1 R91.1 R93.2
N16938600: C36.1 J16.2 R80.2 R82.2
N16938602: C37.1 J17.2 R81.2 R83.2
N16938604: C39.1 J19.2 R85.2 R87.2
N16938606: C38.1 J18.2 R84.2 R86.2
N16938632: Q11.1(BASE) R93.1
N16950891: D2.2(CATHODE) R116.1
N16950894: D3.2(CATHODE) R116.2
N16951766: C44.1 R5.2

Pads without a net: T1 2 6 9 12; U5 4; U6 2 20 21 29 30 34 45 51 61 62; U10 3 5; U11 3 5; U12 3 5; U13 3 5

## Via types
v1: diameter 0.64, hole 0.3, TOP to BOTTOM, 234 vias

## Routing (per net, layer and track width the routed paths; a pad name or vN(x,y) marks a point on that pad's centre or on a via; arc(x,y) is an arc through that point)
12V0: length 22.4
  BOTTOM w0.5: R6.2 90.46,91.44 90.9,91 90.9,80.4 90.2,79.7 84.5,79.7 ; R12.1 83.4,70.8
  BOTTOM w0.6: R12.1 R15.2
GND: length 219.2
  TOP w0.25: U6.47 v1(73.35,35.35) ; v1(69.35,24.85) 69.35,24.95 69.45,25.05 U6.31 ; v1(62,39.3) 62.7,39.3 62.95,39.05 U6.63 ; v1(62.7,24.8) 62.95,25.05 U6.18
  TOP w0.37: 45.44,42.23 R62.1 ; R62.1 45.98,42.8 ; R62.1 45.44,43.37 ; 52.7,24.42 C29.2 53.27,24.96 ; 54.83,33.64 C24.1 55.97,33.64 ; 88.47,39.04 R48.1 87.33,39.04 ; C40.2 74.47,21.09 ; C40.2 73.33,21.09 ; C40.2 73.9,21.63 ; 43.52,51.2 R73.1 44.06,50.63 ; 56.53,39.94 C16.1 57.67,39.94 ; 56.53,35.26 C17.1 57.1,34.72 ; 87.03,21.29 R52.1 ; R52.1 88.17,21.29 ; R52.1 87.6,21.83 ; C41.2 66.2,21.63 ; C41.2 66.77,21.09 ; C41.2 65.63,21.09 ; 55.4,28.32 C25.1 54.83,28.86 ; 70.24,24.17 R25.1 70.78,23.6
  TOP w0.45: 83.41,21.44 Q5.2 ; Q5.2 84.69,21.44 ; Q5.2 84.05,22.08 ; Q5.2 84.05,20.8 ; 43.85,49.15 Q8.2 ; Q8.2 44.49,49.79 ; Q8.2 43.85,50.43 ; Q8.2 43.21,49.79 ; Q4.2 88.49,35.89 ; Q4.2 87.21,35.89 ; Q4.2 87.85,36.53 ; 43.29,39.39 Q6.2 ; Q6.2 43.93,38.75 ; Q6.2 44.57,39.39
  TOP w0.5: U14.3 v1(42.6,56) ; Q4.2 v1(87.85,34.92) ; C25.1 56.06,28.86 v1(56.5,29.3) ; R48.1 v1(87.9,40.1)
  TOP w0.52: 81.58,37.43 U8.3 ; U8.3 82.86,37.93 ; U8.3 82.86,36.93 ; U8.3 84.14,37.43 ; U8.2 82.86,36.66 ; U8.2 84.14,36.16 ; U8.2 82.86,35.66 ; U8.2 81.58,36.16 ; U8.1 82.86,35.39 ; U8.1 84.14,34.89 ; U8.1 82.86,34.39 ; U8.1 81.58,34.89 ; 82.86,38.2 U8.4 ; U8.4 84.14,38.7 ; U8.4 82.86,39.2 ; U8.4 81.58,38.7
  TOP w0.54: 69.43,19.53 C42.1 ; C42.1 70.2,18.91 ; C42.1 70.97,19.53
  TOP w0.58: 62,20.24 Q11.3 62.65,19.41 ; Q10.3 78.1,22.12
  TOP w0.6: J20.2 76.09,15.2 ; J20.2 75.15,16.14 ; J20.2 75.15,14.26 ; J20.2 74.21,15.2 ; J21.2 65.09,15.2 ; J21.2 63.21,15.2 ; J21.2 64.15,14.26 ; J21.2 64.15,16.14 ; J22.6 74.64,4.4 ; J22.6 73.7,3.46 ; J22.6 73.7,5.34 ; J22.6 72.76,4.4
  TOP w0.64: 75.96,25.12 J3.3 ; J3.3 76.9,24.18 ; J3.3 76.9,26.06 ; 57.9,56.82 U4.2 ; U4.2 57.9,59.3 ; U4.2 59.14,58.06 ; U4.2 56.66,58.06 ; 89.36,10.8 TP4.1 ; TP4.1 90.3,9.86 ; TP4.1 90.3,11.74 ; J4.3 76.9,31.06 ; J4.3 76.9,29.18 ; J4.3 75.96,30.12 ; C15.2 50.77,39.45 ; C15.2 49.8,38.48 ; C15.2 48.83,39.45 ; C15.2 49.8,40.42 ; C12.2 50.37,57.75 ; C12.2 48.43,57.75 ; C12.2 49.4,56.78 ; C12.2 49.4,58.72
  GND w0.6: J22.6 74.64,4.4 ; J22.6 72.76,4.4 ; J22.6 73.7,3.46 ; J22.6 73.7,5.34 ; J21.2 65.09,15.2 ; J21.2 64.15,16.14 ; J21.2 63.21,15.2 ; J21.2 64.15,14.26 ; J20.2 76.09,15.2 ; J20.2 74.21,15.2 ; J20.2 75.15,14.26 ; J20.2 75.15,16.14
  GND w0.64: TP4.1 90.3,11.74 ; TP4.1 90.3,9.86 ; TP4.1 89.36,10.8 ; C12.2 49.4,58.72 ; C12.2 48.43,57.75 ; C12.2 49.4,56.78 ; C12.2 50.37,57.75 ; J3.3 76.9,26.06 ; J3.3 76.9,24.18 ; J3.3 75.96,25.12 ; U4.2 59.14,58.06 ; U4.2 57.9,59.3 ; U4.2 57.9,56.82 ; U4.2 56.66,58.06 ; C15.2 50.77,39.45 ; C15.2 49.8,40.42 ; C15.2 48.83,39.45 ; C15.2 49.8,38.48 ; 75.96,30.12 J4.3 ; J4.3 76.9,29.18 ; J4.3 76.9,31.06
  BOTTOM w0.31: ED6.2 78.85,9.25 ; ED6.2 79.35,8.75 ; ED6.2 78.35,8.75 ; 83.85,9.25 ED8.2 83.35,8.75 ; ED4.2 77.75,32.5 ; ED4.2 77.25,32 ; ED4.2 77.75,31.5 ; ED1.2 80.35,27.6 ; ED1.2 79.85,27.1 ; ED1.2 80.35,26.6 ; ED5.2 76.85,8.75 ; ED5.2 76.35,9.25 ; ED5.2 75.85,8.75 ; 77.15,27.1 ED2.2 ; ED2.2 77.65,27.6 ; ED2.2 77.65,26.6 ; ED3.2 81.6,32.5 ; 81.85,8.75 ED7.2 81.35,9.25
  BOTTOM w0.37: 76.72,35.2 C30.1 77.26,35.77 ; C23.1 62.9,38.88 ; C23.1 62.33,38.34 ; C23.1 63.47,38.34 ; 59.84,27.53 R108.1 ; R108.1 60.38,28.1 ; R108.1 59.84,28.67 ; 38.84,23.13 R75.1 ; R75.1 38.84,24.27 ; R75.1 39.38,23.7 ; R41.1 67.24,52.17 ; R41.1 67.78,51.6 ; R41.1 67.24,51.03 ; R114.1 60.38,18.2 ; R114.1 59.84,18.77 ; R114.1 59.84,17.63 ; 59.84,16.03 R115.1 ; R115.1 60.38,16.6 ; R115.1 59.84,17.17 ; 59.84,20.93 R112.1 ; R112.1 59.84,22.07 ; R112.1 60.38,21.5 ; 82.66,50.83 R51.1 ; R51.1 82.66,51.97 ; R51.1 82.12,51.4 ; 59.84,20.47 R113.1 59.84,19.33 ; 60.74,36.33 C19.1 61.28,36.9 ; R109.1 59.84,26.97 ; R109.1 59.84,25.83 ; R109.1 60.38,26.4 ; 47.88,38.8 C14.1 47.34,39.37 ; 75.74,50.83 R42.1 ; R42.1 75.74,51.97 ; R42.1 76.28,51.4 ; R110.1 59.84,25.37 ; R110.1 60.38,24.8 ; R110.1 59.84,24.23 ; R63.1 38.94,13.07 ; R63.1 39.48,12.5 ; R63.1 38.94,11.93 ; R32.1 82.64,36.77 ; R32.1 83.18,36.2 ; R32.1 82.64,35.63 ; R35.1 59.38,51.6 ; R35.1 58.84,52.17 ; R35.1 58.84,51.03 ; 62,25.22 C22.1 ; C22.1 61.43,25.76 ; C22.1 62.57,25.76 ; 59.84,22.63 R111.1 ; R111.1 59.84,23.77 ; R111.1 60.38,23.2 ; 72.2,34.72 C20.1 ; 69.17,25.66 C21.1 68.6,25.12
  BOTTOM w0.45: 38.41,21.99 Q9.2 ; Q9.2 39.05,22.63 ; Q9.2 39.05,21.35 ; VQ5.2 69.01,52.29 ; VQ5.2 69.65,51.65 ; VQ5.2 69.01,51.01 ; VQ5.2 68.37,51.65 ; Q7.2 39.69,10.79 ; Q7.2 39.05,10.15 ; Q7.2 38.41,10.79 ; Q7.2 39.05,11.43 ; 85.91,51.01 VQ7.2 ; VQ7.2 85.91,52.29 ; VQ7.2 85.27,51.65 ; VQ7.2 86.55,51.65 ; VQ3.2 52.65,51.65 ; VQ3.2 51.37,51.65 ; VQ3.2 52.01,52.29 ; VQ3.2 52.01,51.01 ; VQ6.2 78.25,51.65 ; VQ6.2 76.97,51.65 ; VQ6.2 77.61,51.01 ; VQ6.2 77.61,52.29 ; 60.51,51.01 VQ4.2 ; VQ4.2 60.51,52.29 ; VQ4.2 61.15,51.65 ; VQ4.2 59.87,51.65
  BOTTOM w0.5: v1(73.35,35.35) 73.26,35.26 C20.1 ; v1(60.74,39.66) C43.1 C19.1 60.9,36.74 60.9,35.14 ; v1(81,33) 81.35,32.65 ED3.2
  BOTTOM w0.52: 53.94,17.52 U9.9 ; U9.9 55.22,18.02 ; U9.9 55.22,17.02
  BOTTOM w0.54: C18.1 64.48,34.77 ; C18.1 63.86,34 ; C18.1 64.48,33.23
  BOTTOM w0.6: J20.2 76.09,15.2 ; J20.2 75.15,16.14 ; J20.2 75.15,14.26 ; J20.2 74.21,15.2 ; J22.6 74.64,4.4 ; J22.6 73.7,5.34 ; J22.6 72.76,4.4 ; J22.6 73.7,3.46 ; 64.15,14.26 J21.2
  BOTTOM w0.64: 76.9,29.18 J4.3 ; J4.3 75.96,30.12 ; J4.3 76.9,31.06 ; J3.3 76.9,26.06 ; U4.2 59.14,58.06 ; U4.2 57.9,56.82 ; U4.2 56.66,58.06 ; U4.2 57.9,59.3 ; C15.2 49.8,40.42 ; C15.2 49.8,38.48 ; C15.2 48.83,39.45 ; C15.2 50.77,39.45 ; C12.2 50.37,57.75 ; C12.2 49.4,58.72 ; C12.2 48.43,57.75 ; C12.2 49.4,56.78 ; 90.3,9.86 TP4.1 ; TP4.1 89.36,10.8 ; TP4.1 90.3,11.74
  vias: v1(36.5,5) v1(36.6,15.9) v1(39.1,27.4) v1(39.3,19.9) v1(39.6,9.1) v1(39.9,11.8) v1(40.5,1.9) v1(40.9,31.9) v1(41.6,59.6) v1(41.7,53.9) v1(41.7,43.3) v1(42.7,23.3) v1(43.2,25.7) v1(43.2,18.6) v1(44.3,14.6) v1(45.5,3.4) v1(46.3,6.9) v1(46.5,31.7) v1(46.6,57.2) v1(46.6,16.2) v1(48.5,29.8) v1(50.5,31.2) v1(51.9,48.6) v1(52.1,40.3) v1(52.4,17.4) v1(52.6,13.2) v1(53.2,24) v1(53.3,22.1) v1(53.3,10.7) v1(54,6) v1(54.1,32.6) v1(54.2,29.8) v1(55.3,1.4) v1(55.4,48.4) v1(56.1,39.7) v1(56.1,35.8) v1(56.34,33.64) v1(57.1,34.39) v1(57.9,15) v1(59.8,48) v1(60.8,25.7) v1(60.8,10.7) v1(61.2,13) v1(61.9,6.1) v1(63.1,47.2) v1(63.1,20.3) v1(63.1,19.1) v1(63.3,34) v1(63.8,35.2) v1(64.5,11.3) v1(65.3,1.6) v1(67.6,57.8) v1(67.6,32.7) v1(67.8,22.2) v1(68.8,12.1) v1(69.8,43.3) v1(70.9,2.1) v1(71,7.4) v1(72,47.3) v1(72.5,52) v1(73.3,24.8) v1(75.3,38.2) v1(75.4,9) v1(75.9,42.8) v1(76.5,27.2) v1(76.8,31.9) v1(77,22.4) v1(77.6,12.8) v1(78.7,9.7) v1(79.2,16.8) v1(79.6,47) v1(79.6,23.1) v1(79.7,52) v1(79.7,27.9) v1(79.9,2.1) v1(80.8,10.4) v1(80.9,35.1) v1(81.4,39.8) v1(82.2,23.2) v1(82.9,40.3) v1(83,2) v1(83.4,25.5) v1(83.5,9.6) v1(83.7,17.8) v1(84.3,43.2) v1(84.5,58.8) v1(84.8,37.7) v1(85.6,47.8) v1(86.1,53.3) v1(86.8,32.3) v1(86.8,18.2) v1(87.1,2) v1(87.3,28.3) v1(87.6,23.7) v1(88.1,53.8) v1(89.6,54.1) v1(89.6,16.4) v1(89.6,13.3) v1(89.7,46.5) v1(90.8,22.6)
GNDA: length 71.8
  TOP w0.25: v1(62.1,30.35) U6.12
  TOP w0.5: R83.1 C37.2 50.79,21.09 50.1,20.4 v1(50.1,10.4) ; v1(65.1,18.5) 65.1,17.7 64.4,17 60.1,17 59.2,16.1 v1(59.2,10.5) 60.26,9.44 v1(69.8,9.44)
  BOTTOM w0.5: v1(59.2,10.5) 58.6,9.9 R87.1 C39.2 56.7,9.44 R86.1 C38.2 50,10.3 v1(50.1,10.4) ; v1(65.1,18.5) 65.1,28.5 63.25,30.35 v1(62.1,30.35) 62.05,30.3 C27.1 C26.2 60.64,32.76 60.7,32.82 60.7,32.83 60.8,32.93 LFB2.2 ; v1(69.8,9.44) R82.1 C36.2
GNDAC: length 2.5
  BOTTOM w0.6: v1(57.9,70.4) 57.3,69.8 C9.2
GNDS: length 20.7
  TOP w0.5: v1(81.7,82.5) 82.2,82 88,82
  BOTTOM w0.5: Q1.3 v1(85.08,64.24) ; v1(86.54,75.54) C45.1 v1(87.7,74.6) ; v1(90.8,93.1) 88.43,93.1 87.5,92.17 R11.1 R7.1 ; R20.1 v1(86.8,68.5) ; v1(81.7,82.5) 81.7,85 82.1,85.4 R5.1
  vias: v1(89.7,84.9) v1(89.7,83.9) v1(89.7,82.9)
VCC_3V3: length 54.2
  TOP w0.25: v1(69.5,27.8) 69.95,27.35 U6.32 ; U6.64 62.45,36.25 v1(62.9,35.8) ; U6.48 72.85,35.85 v1(73.4,36.4) ; v1(63,27.8) 63.45,27.35 U6.19 ; U6.1 61.95,35.85 v1(62,35.8)
  TOP w0.5: v1(51.8,23.9) 51.3,23.9 51,24.2 R26.2 ; R89.2 v1(60.8,19.61) ; R78.1 45.64,55.24 45.3,54.9 43.5,54.9 v1(43.44,54.84) ; R27.2 74.06,24.26 v1(73.7,23.9) ; v1(80.7,22.2) R88.2 ; U8.8 v1(79.8,34.89)
  BOTTOM w0.5: v1(76.1,38.8) R31.2 R30.2 ; v1(63,27.8) 62.44,27.24 C22.2 ; v1(58.39,38.6) C43.2 ; C43.2 v1(59.26,39.7) ; C43.2 C19.2 59.26,36.14 59.06,35.94 59.06,35.93 59.1,35.89 LFB1.1 ; v1(43.44,54.84) 43.44,37.36 43.8,37 44.3,37 ; v1(73.4,36.4) 73.06,36.74 C20.2 ; C30.2 79.49,35.2 v1(79.8,34.89) ; C23.2 v1(62.9,35.8) ; v1(69.5,27.8) 68.84,27.14 C21.2 ; v1(67.4,34) C18.2 v1(66.32,35.18)
  vias: v1(51.3,37.3) v1(51.3,36.4) v1(51.3,35.6) v1(73.7,23) v1(74.7,23)
VCC_5V0: length 23.6
  TOP w0.5: R90.2 71.51,21.09 71.3,21.3 70.27,21.3 C42.2 v1(69,21.37) 68.72,21.09 R91.2 ; v1(45.94,47.1) 45.94,46.22 R65.1 ; v1(83,22.4) 82.4,21.8 R47.2 ; R53.1 47.1,35.3 47.6,35.8 47.6,41 48.5,41.9 v1(49,41.9) ; R36.2 v1(86.1,40.1)
  BOTTOM w0.3: U5.3 47.55,42.85 47.3,42.6 45.96,42.6 45.65,42.91 U5.1
  BOTTOM w0.5: R54.1 v1(38.92,5.4) ; R66.1 v1(39.12,16.52)
VCC_12V: length 1.7
  BOTTOM w0.5: U9.10 46.18,17.18 v1(45.2,16.2)
  vias: v1(82.2,55.4) v1(82.2,54.4) v1(83.2,55.4) v1(83.2,54.4) v1(84.2,55.4) v1(84.2,54.4)
VCCA_3V3: length 64.1
  TOP w0.25: U6.13 61.65,29.85 v1(62.1,29.4)
  TOP w0.5: J16.1 67.7,6.8 66.8,7.7 59.7,7.7 59.2,7.2 ; J18.1 50.7,6.3 52.2,7.8 54.4,7.8 55.6,9 ; 55.6,9 56.8,7.8 58.6,7.8 59.2,7.2 ; 55.6,9 J17.1 56.4,15.2 59.1,17.9 v1(64,17.9) ; 59.2,7.2 J19.1
  BOTTOM w0.5: v1(64,17.9) 64.2,18.1 64.2,28 62.8,29.4 v1(62.1,29.4) 59.44,29.4 59.16,29.68 C27.2 C26.1 59.16,32.76 59.1,32.82 LFB1.2
ADC12_IN10: length 30.6
  TOP w0.2: U6.8 62.75,32.35 63.13,32.73 64.97,32.73 v1(65.6,32.1)
  BOTTOM w0.2: R80.1 65.1,10.1 66.8,11.8 66.8,13.3 68.2,14.7 68.2,17 67.1,18.1 67.1,30.2 66.05,31.25 66.05,31.65 v1(65.6,32.1)
ADC12_IN11: length 43.4
  TOP w0.2: v1(54.4,12.5) 54.4,16.5 56.1,18.2 56.1,20.8 55.91,20.99 R81.1 ; v1(63.8,32) 63.65,31.85 U6.9
  BOTTOM w0.2: v1(54.4,12.5) 54.5,12.6 59.2,12.6 60.2,13.6 60.2,15.5 61.7,17 65.06,17 65.9,17.84 65.9,29 64.15,30.75 64.15,31.65 v1(63.8,32)
ADC12_IN12: length 43.4
  TOP w0.2: U6.10 64.05,31.35 v1(64.7,32)
  BOTTOM w0.2: R84.1 48.2,10 49.9,11.7 62,11.7 62.8,12.5 62.8,16 63.3,16.5 65.13,16.5 66.3,17.67 66.3,29.31 64.7,30.91 v1(64.7,32)
ADC12_IN13: length 30
  TOP w0.2: v1(65.5,31.1) 65.35,30.95 61.54,30.95 61.44,30.85 U6.11
  BOTTOM w0.2: R85.1 65.4,13.84 65.4,16.2 66.7,17.5 66.7,29.9 v1(65.5,31.1)
AIRFAN_CTR: length 27.1
  TOP w0.2: v1(75.1,40) 74.6,39.5 74.6,37.71 75.8,36.51 75.8,32.83 74.82,31.85 U6.40
  BOTTOM w0.2: R50.2 82.3,49.7 81.6,49 81.6,43.3 80.9,42.6 77.5,42.6 75.1,40.2 v1(75.1,40)
AIRPUMP_CTR: length 37.9
  TOP w0.2: U6.37 72.9,30.35 73.1,30.15 74.05,30.15 74.4,30.5 v1(74.4,30.6)
  BOTTOM w0.2: R35.2 R34.2 56.8,49.8 56.5,49.5 56.5,43.8 59.1,41.2 66.91,41.2 70.5,37.61 70.5,32.73 73.08,30.15 74.04,30.15 74.4,30.51 v1(74.4,30.6)
BEEP_CTR: length 26.1
  TOP w0.2: U6.52 68.45,38.69 70.46,40.7 77.4,40.7 77.9,40.2 v1(77.9,39.8) ; R46.1 89.7,40.8 v1(89.6,40.9)
  BOTTOM w0.2: v1(77.9,39.8) 79.4,41.3 89.2,41.3 v1(89.6,40.9)
BOOT0: length 3
  TOP w0.2: U6.60 64.45,39.35 v1(64.3,39.5)
  BOTTOM w0.2: v1(64.3,39.5) 64.6,39.2 R24.2
DEO_CTR: length 25.9
  TOP w0.2: v1(76.1,37.4) 76.5,37 76.5,32.8 75.05,31.35 U6.39
  BOTTOM w0.2: R42.2 R39.2 74.2,49.7 73.5,49 73.5,39 75.1,37.4 v1(76.1,37.4)
DIS_A_CTR: length 7.4
  TOP w0.2: v1(56.99,27.78) 58.56,29.35 U6.14
  BOTTOM w0.5: R108.2 58.36,28.07 58.07,27.78 v1(56.99,27.78) 55.32,27.78 U9.1
DIS_B_CTR: length 7.8
  TOP w0.2: v1(56.9,26.8) 57.2,26.8 59.25,28.85 U6.15
  BOTTOM w0.5: U9.2 56,26.41 56.01,26.4 56.3,26.4 56.7,26.8 v1(56.9,26.8) 57.2,26.8 57.6,26.4 R109.2
DIS_C_CTR: length 8.2
  TOP w0.2: U6.16 59.75,28.35 57.1,25.7 v1(57.1,25.6)
  BOTTOM w0.5: R110.2 57.9,24.8 v1(57.1,25.6) 56.5,25.6 56.04,25.14 U9.3
DIS_D_CTR: length 10.4
  TOP w0.2: v1(57,23.87) 57.37,23.87 58.5,25 62,25 62.45,25.45 U6.17
  BOTTOM w0.5: U9.4 v1(57,23.87) 57.69,23.87 R111.2
FLOW_DET: length 24.6
  TOP w0.2: R89.1 59.49,21.1 59.49,21.12 59.81,21.44 Q11.2 61.91,22.3 65.5,22.3 66,22.8 67.1,22.8 v1(67.7,23.4) ; v1(66.6,32.1) 66.6,32.7 65.45,33.85 U6.58
  BOTTOM w0.2: v1(67.7,23.4) 67.7,30.4 66.6,31.5 v1(66.6,32.1)
I2C1_SCL: length 22.5
  TOP w0.2: U8.6 78.21,37.5 79.6,37.5 v1(79.8,37.3) 80.6,38.1 80.6,40 78.9,41.7 69.6,41.7 67.45,39.55 U6.54
  BOTTOM w0.2: v1(79.8,37.3) 79.6,37.1 R30.1
I2C1_SDA: length 18.5
  TOP w0.2: U8.5 79.7,38.7 v1(79.8,38.8) 79.9,38.9 79.9,39.6 78.3,41.2 69.9,41.2 67.95,39.25 U6.53
  BOTTOM w0.2: R31.1 v1(79.8,38.8)
KEY_INT: length 38.9
  TOP w0.2: v1(68,34.9) 69.45,36.35 U6.50
  BOTTOM w0.2: J22.5 76.35,4.55 ED5.1 75.45,7.85 69.89,13.41 69.89,17.43 70.79,18.33 70.79,29.27 68.2,31.86 68.2,34.7 v1(68,34.9)
L2: length 3.2
  TOP w0.8: R55.2 v1(26.7,37.15) ; R67.2 v1(26.83,43.95)
LED_CTR: length 27.9
  TOP w0.2: v1(73.6,26.2) 72,26.2 69.85,28.35 67.35,28.35 66.45,27.45 U6.25 ; R49.2 v1(89.3,22.4)
  BOTTOM w0.2: v1(73.6,26.2) 74.1,26.2 76.4,23.9 83.6,23.9 85,22.5 89.2,22.5 v1(89.3,22.4)
N: length 32.7
  TOP w0.5: U14.2 34.8,54.7 34.7,54.6 34.7,54.46 34.8,54.36 v1(34.84,54.36)
  GND w0.8: v1(34.84,54.36) 34.78,54.42 30.18,54.42 16.8,67.8 J23.1
NOZ_A_CTR: length 13.8
  TOP w0.2: U6.22 64.95,25.15 64.05,24.25 58.65,24.25 v1(57,22.6)
  BOTTOM w0.5: R112.2 57.26,22.6 v1(57,22.6) U9.5
NOZ_B_CTR: length 15.3
  TOP w0.2: U6.23 65.45,24.95 64.31,23.81 59.17,23.81 57.4,22.04 57.4,21.65 v1(57.08,21.33)
  BOTTOM w0.5: U9.6 v1(57.08,21.33) 57.08,21.18 R113.2
NOZ_C_CTR: length 18
  TOP w0.2: U6.26 66.95,25.45 64.9,23.4 59.33,23.4 58,22.07 58,20.71 56.99,19.7 v1(56.99,19.6)
  BOTTOM w0.5: R114.2 58.36,18.23 v1(56.99,19.6) 56.53,20.06 U9.7
NOZ_D_CTR: length 20.4
  TOP w0.2: U6.27 67.45,25.15 65.2,22.9 59.4,22.9 58.6,22.1 58.6,19.59 v1(57.1,18.09)
  BOTTOM w0.5: R115.2 57.81,16.6 57.1,17.31 v1(57.1,18.09) 56.4,18.79 U9.8
OSC32_IN: length 9.9
  TOP w0.2: X1.2 54.6,38.01 54.81,37.8 56.44,37.8 C16.2 58.5,37.06 58.5,35.6 59.25,34.85 U6.3
OSC32_OUT: length 9.6
  TOP w0.2: U6.4 58.95,34.35 58.1,35.2 58.1,36.72 57.74,37.08 57.44,37.08 C17.2 56.44,37.4 54.91,37.4 54.6,37.09 X1.1
OSC_IN: length 10.7
  TOP w0.2: U6.5 58.94,33.85 57.13,32.04 R21.2 56.14,32.04 56.02,32.16 C24.2 54.64,31.4 52.6,31.4 52.14,31.86 X2.2
OSC_OUT: length 11.9
  TOP w0.2: U6.6 59.15,33.35 57.9,32.1 57.9,30.74 57.72,30.56 R21.1 56.42,30.56 56.2,30.34 C25.2 54.84,30.9 52.7,30.9 52.14,30.34 X2.1
PWM1_CTR: length 41.1
  TOP w0.2: R59.1 47.54,43.2 50.9,43.2 52.1,42 59,42 v1(59.4,42.4) ; v1(70.3,39.2) 70.8,39.7 71.9,39.7 75.3,36.3 75.3,33.2 74.45,32.35 U6.41
  BOTTOM w0.2: v1(59.4,42.4) 60,41.8 67.7,41.8 v1(70.3,39.2)
PWM2_CTR: length 45.9
  TOP w0.2: U6.44 73.22,33.85 73.32,33.95 74.05,33.95 74.8,34.7 74.8,36.01 71.81,39 v1(71.3,39) ; v1(60.8,42.4) 60,43.2 58.8,43.2 58.2,42.6 52.39,42.6 51.29,43.7 48.1,43.7 46.8,45 46.8,52.8 46.5,53.1 R71.1
  BOTTOM w0.2: v1(60.8,42.4) 67.9,42.4 v1(71.3,39)
PWM3_CTR: length 40.6
  TOP w0.2: U6.35 63.57,29.35 60.92,26.7 59.55,26.7 57.35,24.5 55.8,24.5 54,22.7 50.1,22.7 48.5,21.1 48.5,18.79 46.71,17 41.7,17 v1(40.2,15.5)
  BOTTOM w0.2: R60.1 39,14.3 v1(40.2,15.5)
PWM4_CTR: length 46.8
  TOP w0.2: U6.36 63.35,29.85 60.8,27.3 59.58,27.3 57.23,24.95 55.55,24.95 53.8,23.2 49.9,23.2 48,21.3 48,19.2 46.44,17.64 v1(41.7,17.64)
  BOTTOM w0.2: R72.1 39.6,25.5 40.2,24.9 40.2,17.9 40.46,17.64 v1(41.7,17.64)
SPI1_MISO: length 49.4
  TOP w0.2: U6.56 66.45,39.45 v1(66.4,39.5)
  BOTTOM w0.2: J22.2 83.85,4.55 ED8.1 82.85,7.85 82.7,8 82.7,9.6 80.9,11.4 74.2,11.4 71.1,14.5 71.1,16.8 72,17.7 72,30.03 69.5,32.53 69.5,36.6 66.6,39.5 v1(66.4,39.5)
SPI1_MOSI: length 45.4
  TOP w0.2: v1(66.3,36.5) 65.95,36.85 U6.57
  BOTTOM w0.2: J22.3 81.35,4.55 ED7.1 80.65,7.85 80.4,8.1 80.4,9.49 79.3,10.59 74.11,10.59 70.7,14 70.7,17.1 71.6,18 71.6,29.63 69.1,32.13 69.1,35.89 68.49,36.5 v1(66.3,36.5)
SPI1_SCK: length 41.6
  TOP w0.2: v1(68,35.9) 67.9,35.9 66.95,36.85 U6.55
  BOTTOM w0.2: J22.4 78.85,4.55 ED6.1 77.95,7.85 77.7,8.1 77.7,9.4 77.1,10 74,10 70.29,13.71 70.29,17.26 71.19,18.16 71.19,29.1 71.2,29.11 71.2,29.43 68.6,32.03 68.6,35.3 v1(68,35.9)
STM32_ACT: length 2.9
  TOP w0.2: D5.1 73.94,29.14 73.15,28.35 U6.33
STM32_RST#: length 14.1
  TOP w0.2: R26.1 51.62,26.44 ; 51.62,26.44 51.78,26.6 TP5.1 54.84,26.6 58.8,30.56 58.8,32.1 59.55,32.85 U6.7 ; 51.62,26.44 C29.1
SWCLK: length 27.9
  TOP w0.2: U6.49 v1(71.9,37.88)
  BOTTOM w0.2: v1(71.9,37.88) 71.4,37.38 71.4,34.6 71.9,34.1 74.8,34.1 75.1,33.8 81.2,33.8 82.3,32.7 82.3,29 82,28.7 79.4,28.7 78.55,27.85 ED2.1 78.55,25.47 J3.2
SWDIO: length 21.3
  TOP w0.2: v1(74.2,35.2) 73.7,34.7 73.22,34.7 73.07,34.85 U6.46
  BOTTOM w0.2: v1(74.2,35.2) 74.57,35.2 75.47,34.3 81.47,34.3 83,32.77 83,28.6 82.5,28.1 81.6,28.1 81.25,27.75 ED1.1 81.25,25.47 J3.1
TOUCH_DET: length 24.4
  TOP w0.2: U6.24 65.95,28.05 66.65,28.75 70.26,28.75 71.91,27.1 v1(73.6,27.1) ; R88.1 80.35,19.26 Q10.2 79.05,22.05 v1(79.2,22.2)
  BOTTOM w0.2: v1(79.2,22.2) 78.3,23.1 76.5,23.1 74.1,25.5 73.3,25.5 73.05,25.75 73.05,26.65 73.5,27.1 v1(73.6,27.1)
USART1_RX: length 9.9
  TOP w0.2: v1(73.5,33.35) U6.43
  BOTTOM w0.2: v1(73.5,33.35) 73.5,33.11 73.91,32.7 75,32.7 75.3,33 78.19,33 78.65,32.54 ED4.1 78.9,31.75 J4.2
USART1_TX: length 12
  TOP w0.2: v1(74.4,33.4) 74.4,33.3 73.85,32.75 73.12,32.75 73.02,32.85 U6.42
  BOTTOM w0.2: J4.1 80.9,31.25 80.45,31.7 ED3.1 80.5,32.05 80.5,32.7 79.8,33.4 v1(74.4,33.4)
UV_CTR: length 54.3
  TOP w0.2: U6.28 67.95,25.06 68.76,24.25 R25.2 68.76,22.85 68.91,22.7 71.9,22.7 72.2,23 v1(72.7,23)
  BOTTOM w0.2: R33.2 49.44,51.44 49.1,51.1 49.1,48.3 49.7,47.7 54.5,47.7 55.8,46.4 55.8,43.5 58.6,40.7 66.3,40.7 70,37 70,32.6 72.65,29.95 72.65,23.05 v1(72.7,23)
WATERSV_CTR: length 28.2
  TOP w0.2: U6.38 73.25,30.85 73.4,30.7 v1(73.43,30.7)
  BOTTOM w0.2: R41.2 R38.2 65.76,49.66 64.9,48.8 64.9,44.7 66.5,43.1 68.41,43.1 71.99,39.52 71.99,38.89 71,37.9 71,33.13 v1(73.43,30.7)
ZPD: length 36.6
  TOP w0.2: U6.59 64.95,39.85 61.1,43.7 58.13,43.7 57.53,43.1 52.69,43.1 51.59,44.2 48.3,44.2 47.4,45.1 47.4,57.4 46.5,58.3 R79.1
N16929349: length 3
  BOTTOM w0.5: v1(82.4,92.5) 82.1,92.2 C44.2 R4.2
N16929367:
  vias: v1(52.2,77.6) v1(52.2,76.6)
N16929439: length 28.6
  TOP w0.5: v1(80.1,62.2) 63.2,62.2 62.4,63 62.4,64.7 61.83,65.27 U3.2
  BOTTOM w0.5: Q1.2 81.85,62.21 R14.1 80.36,62.46 v1(80.1,62.2)
  BOTTOM w0.6: C8.1 83,65.44 83,62.9 83.15,62.75 Q1.2
N16929443: length 30.2
  TOP w0.5: U3.1 v1(59.27,62.73)
  BOTTOM w0.5: v1(59.27,62.73) 62.07,62.73 62.6,62.2 78.7,62.2 80.44,63.94 R14.2 81.6,67.16 82.1,67.66 R12.2
N16929461: length 9
  BOTTOM w0.5: 85.03,65.99 85.1,66.06 R20.2 86.8,62.7 86.31,62.21 Q1.1
  BOTTOM w0.6: R15.1 85,67.56 85,66.02 85.03,65.99 C8.2
N16929475: length 7.2
  TOP w0.5: U2.3 55.63,69.87 R18.2 C7.1 R16.2
N16929487: length 4.8
  TOP w0.5: U3.3 52.26,65.87 R16.1 C7.2
N16929503: length 2.9
  BOTTOM w0.6: R9.1 58.17,66.38 D4.1
N16929505: length 13.2
  TOP w0.5: U3.4 v1(53.73,62.73)
  TOP w0.6: v1(53.09,71.4) U2.1
  BOTTOM w0.5: v1(53.73,62.73) 53.84,62.84 D4.2
  BOTTOM w0.6: D4.2 53.78,66.66 C9.1 53.69,69.8 53.09,70.4 v1(53.09,71.4)
N16929519: length 10.1
  TOP w0.6: U2.2 v1(54.36,71.4)
  BOTTOM w0.6: R19.2 R8.1 60.76,71.4 v1(54.36,71.4)
N16929541:
  vias: v1(60.4,93.9) v1(60.4,93) v1(61.3,93.9) v1(61.3,93) v1(62.3,93.9) v1(62.3,93)
N16930021: length 3
  BOTTOM w0.5: U1.4 87.25,86.25 86.89,86.61 v1(85.31,86.61)
N16930023: length 3.9
  BOTTOM w0.5: U1.1 85.35,89.05 85.7,89.4 R7.2 R4.1
N16930063: length 2
  BOTTOM w0.5: U1.3 87.88,88.05 88.29,87.64 R10.2
N16930103: length 4.2
  BOTTOM w0.5: U1.2 86.3,88.79 87.47,89.96 R11.2 R6.1
N16932256: length 1.9
  TOP w0.3: D5.2 R27.1
N16932453: length 3
  TOP w0.2: U8.7 79.86,36.16 v1(79.9,36.2)
  BOTTOM w0.2: R32.2 v1(79.9,36.2)
N16934524: length 11.3
  TOP w0.2: 84.9,27.7 LS1.1
  TOP w0.5: R36.1 86.2,37.46 R44.2 85.24,35.64 84.9,35.3 84.9,27.7
N16934528: length 9.5
  TOP w0.5: LS1.2 89.9,32.76 Q4.3 86.5,33.86 R44.1
N16934693: length 7.3
  TOP w0.5: D12.1 v1(70.35,48.95) 69.25,47.85 J7.1
  BOTTOM w0.5: v1(70.35,48.95) 71.04,49.64 VQ5.3
N16934756: length 7.9
  TOP w0.5: D13.1 78.85,48.75 v1(79.05,48.55)
  BOTTOM w0.5: J8.1 77.75,47.25 v1(79.05,48.55) 79.64,49.14 VQ6.3
N16934805: length 7.3
  TOP w0.5: J6.1 60.75,47.85 v1(61.85,48.95) D11.1
  BOTTOM w0.5: v1(61.85,48.95) 62.54,49.64 VQ4.3
N16934865: length 7.8
  TOP w0.5: J9.1 86.25,46.85 87.5,48.1 v1(87.5,48.6) 87.45,48.65 87.45,50.2 D14.1
  BOTTOM w0.5: v1(87.5,48.6) 87.64,48.6 87.94,48.9 VQ7.3
N16934913: length 1.7
  BOTTOM w0.5: VQ4.1 59.68,49.75 59.63,49.8 R34.1
N16934946: length 1.8
  BOTTOM w0.5: R38.1 68.03,49.9 68.18,49.75 VQ5.1
N16934979: length 1.9
  BOTTOM w0.5: VQ6.1 76.78,49.75 76.73,49.7 R39.1
N16935020: length 3.5
  BOTTOM w0.5: R51.2 R50.1 84.87,49.7 84.92,49.75 VQ7.1
N16935053: length 2
  BOTTOM w0.5: VQ3.1 51.18,49.75 50.97,49.96 R33.1
N16935063: length 7.4
  TOP w0.5: J5.1 53.45,46.75 v1(53.45,48.9) D10.1
  BOTTOM w0.5: VQ3.3 54.04,49.49 v1(53.45,48.9)
N16935139: length 4.5
  TOP w0.5: Q5.1 85.95,20.55 86.69,19.81 R52.2 R49.1
N16935141: length 4.7
  TOP w0.5: J10.1 85,16.35 Q5.3
N16935153: length 4.9
  TOP w0.5: J10.2 82.4,16.45 R47.1
N16935178: length 3.5
  TOP w0.5: R48.2 R46.2 89.75,37.51 Q4.1
N16935952: length 32.1
  BOTTOM w0.5: J11.5 41.85,3.65 44.7,6.5 44.7,8.7 51.1,15.1 51.1,25.6 49.02,27.68 U9.18
N16935958: length 27
  BOTTOM w0.5: U9.17 48.78,26.41 50.1,25.09 50.1,15.3 41.35,6.55 J11.4
N16935964: length 22.7
  BOTTOM w0.5: J11.3 42.05,8.65 49.2,15.8 49.2,24.3 48.36,25.14 U9.16
N16935970: length 18.1
  BOTTOM w0.5: U9.15 47.52,23.87 48.3,23.09 48.3,16.59 42.86,11.15 J11.2
N16935976: length 6.9
  BOTTOM w0.5: J12.5 42.25,19.65 43.2,20.6 43.2,22.1 43.7,22.6 U9.14
N16935982: length 5.2
  TOP w0.5: v1(44.4,21.33) 43.58,22.15 J12.4
  BOTTOM w0.5: U9.13 v1(44.4,21.33)
N16935988: length 10.3
  TOP w0.5: v1(44.3,19.6) 44.4,19.6 45.3,20.5 45.3,22.5 43.15,24.65 J12.3
  BOTTOM w0.5: U9.12 44.76,20.06 v1(44.3,19.6)
N16935994: length 15.1
  TOP w0.5: J12.2 43.55,27.15 46.3,24.4 46.3,20.31 v1(44.29,18.3)
  BOTTOM w0.5: U9.11 44.78,18.79 v1(44.29,18.3)
N16936948: length 5.2
  TOP w0.8: R61.2 22.35,32.1 C32.2
N16936962: length 5.4
  TOP w0.8: R74.2 27.45,54.45 26.3,55.6 25.4,55.6
N16936988: length 9.9
  TOP w0.8: J14.2 22.46,19.56 23.68,20.78 R76.2
N16936994: length 7.5
  TOP w0.8: 21.7,11.5 22.72,11.5 23.38,10.84 R64.2
N16937195: length 5
  TOP w0.2: R78.2 R79.2 43.92,58.54 U14.4
N16937225:
  vias: v1(34.1,59.4) v1(35.2,59.36)
N16937247: length 2.3
  TOP w0.5: U10.1 42.14,35.3 R53.2
N16937249: length 3.2
  TOP w0.2: U10.2 42.62,37.36 Q6.3
N16937284: length 5
  TOP w0.2: Q6.1 45.83,39.97 45.5,40.3 44.2,40.3 43.96,40.54 R59.2 43.96,41.72 43.94,41.74 43.94,42.16 43.96,42.18 R62.2
N16937315: length 39.2
  TOP w0.8: R61.1 31.8,32.1 33.98,34.28 U10.6
  GND w0.8: U10.6 32.55,34.03 25.87,34.03 22.6,37.3 19.8,37.3 13.73,43.37 10.21,43.37 D15.3
N16937351: length 5.6
  TOP w0.8: R55.1 33.92,40.6 U10.4
N16937398: length 3.9
  TOP w0.2: Q8.3 44.1,47.76 43.8,47.46 42.64,47.46 41.9,48.2 41.9,48.62 U12.2
N16937400: length 1.9
  TOP w0.5: U12.1 42.24,45.9 R65.2
N16937449: length 4.5
  TOP w0.2: R71.2 44.1,53.06 44.1,52.4 44.3,52.2 45.2,52.2 45.54,51.86 R73.2 45.54,50 Q8.1
N16937461: length 30.3
  TOP w0.8: R74.1 33.62,51.6 U12.4
  GND w0.8: U12.4 18.46,51.24 17.1,52.6 17.1,55 14.92,57.18 D17.3
N16937489: length 6.1
  TOP w0.8: U12.6 32.33,46.16 31.09,47.4 R67.1
N16937538: length 3.2
  BOTTOM w0.2: U11.2 35.6,9.6 36.44,8.76 Q7.3
N16937540: length 2
  BOTTOM w0.5: R54.2 35.61,6.7 U11.1
N16937587: length 3.6
  BOTTOM w0.2: Q7.1 37.15,11.57 37.46,11.88 R63.2 R60.2
N16937601: length 33.5
  TOP w0.8: R64.1 26.7,5.3 27.25,5.85 U11.6
  GND w0.8: D16.3 6.35,16.49 7.06,17.2 13.9,17.2 15.73,15.37 24.13,15.37 24.9,14.6 24.9,9.41 U11.6
